# EAGLE board SparkFun_Buck_Regulator_AP63357DV-7_BabyBuck5V-Panel (EAGLE 9.6.2), part 1 of 5
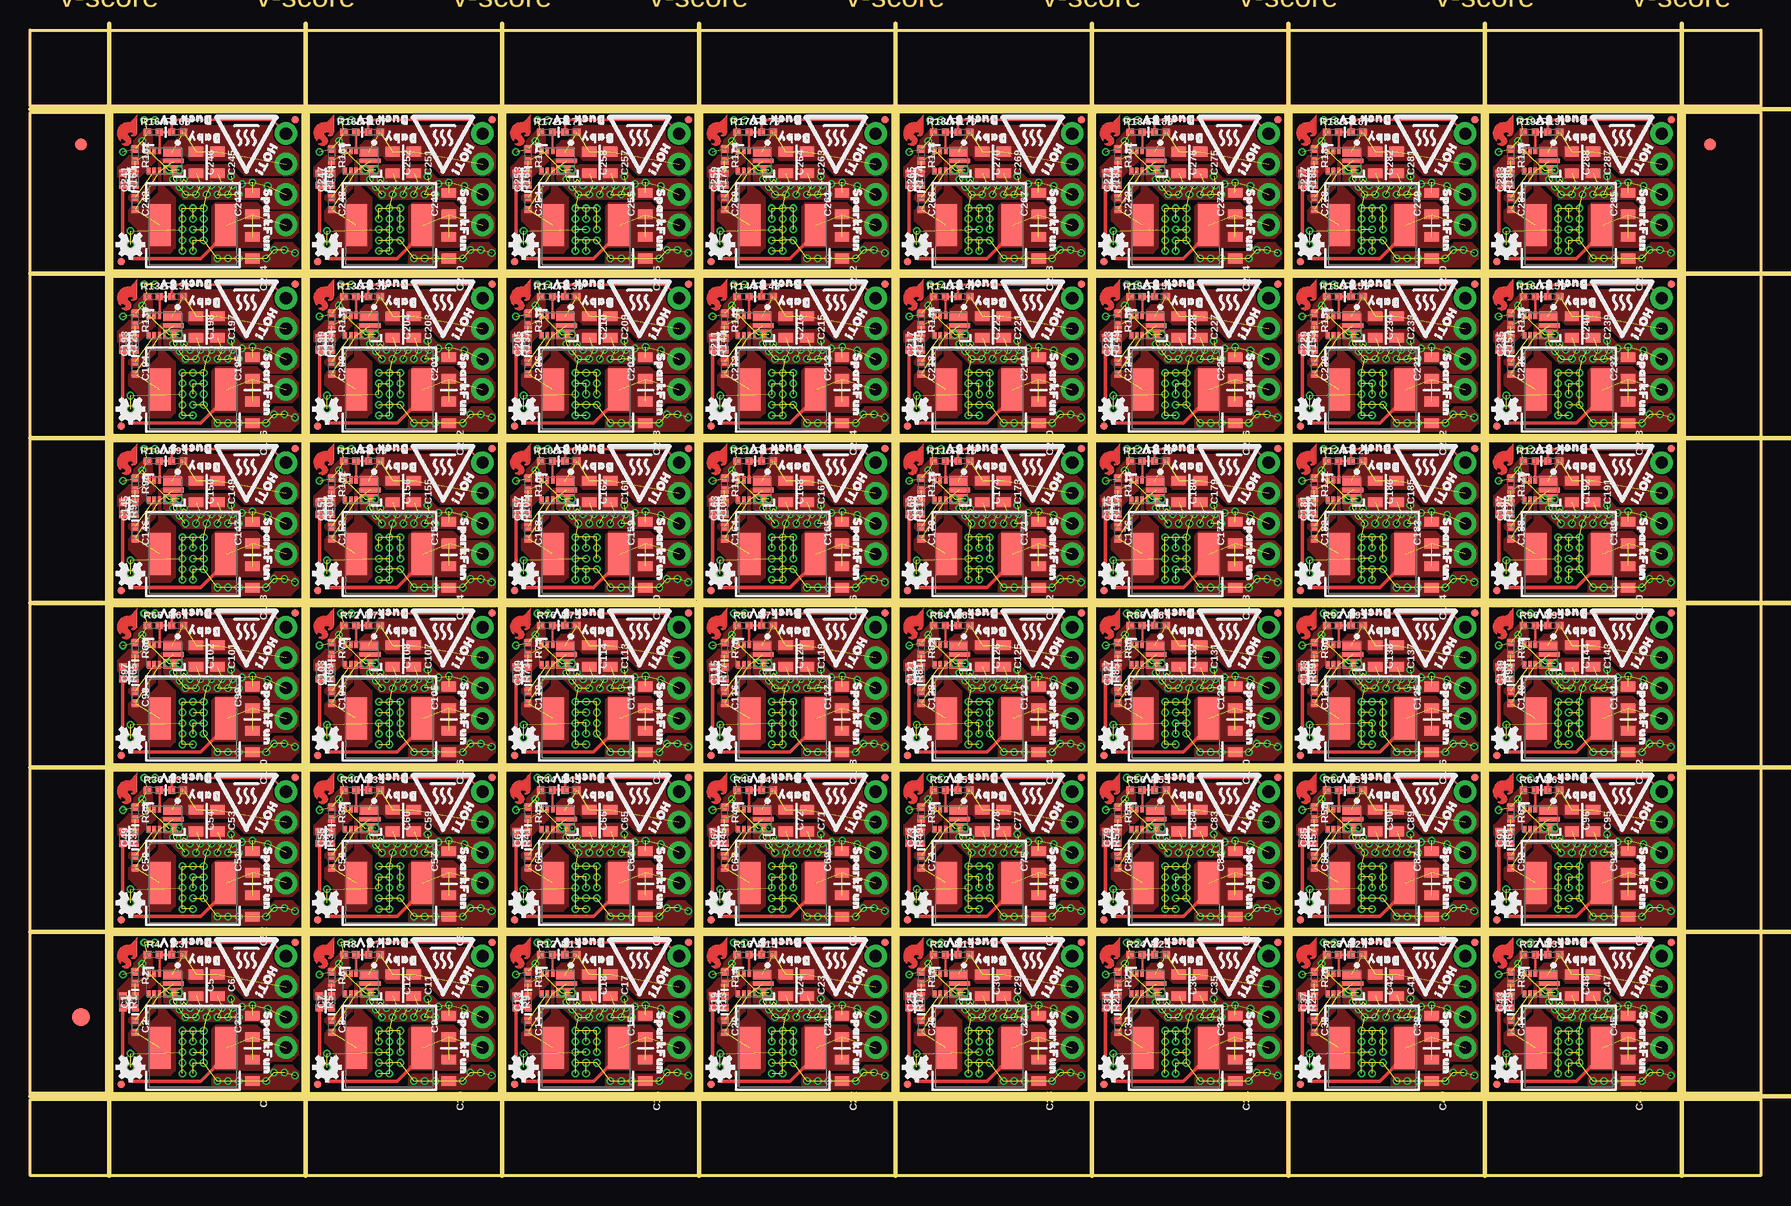
[diagram p0: board, top side]
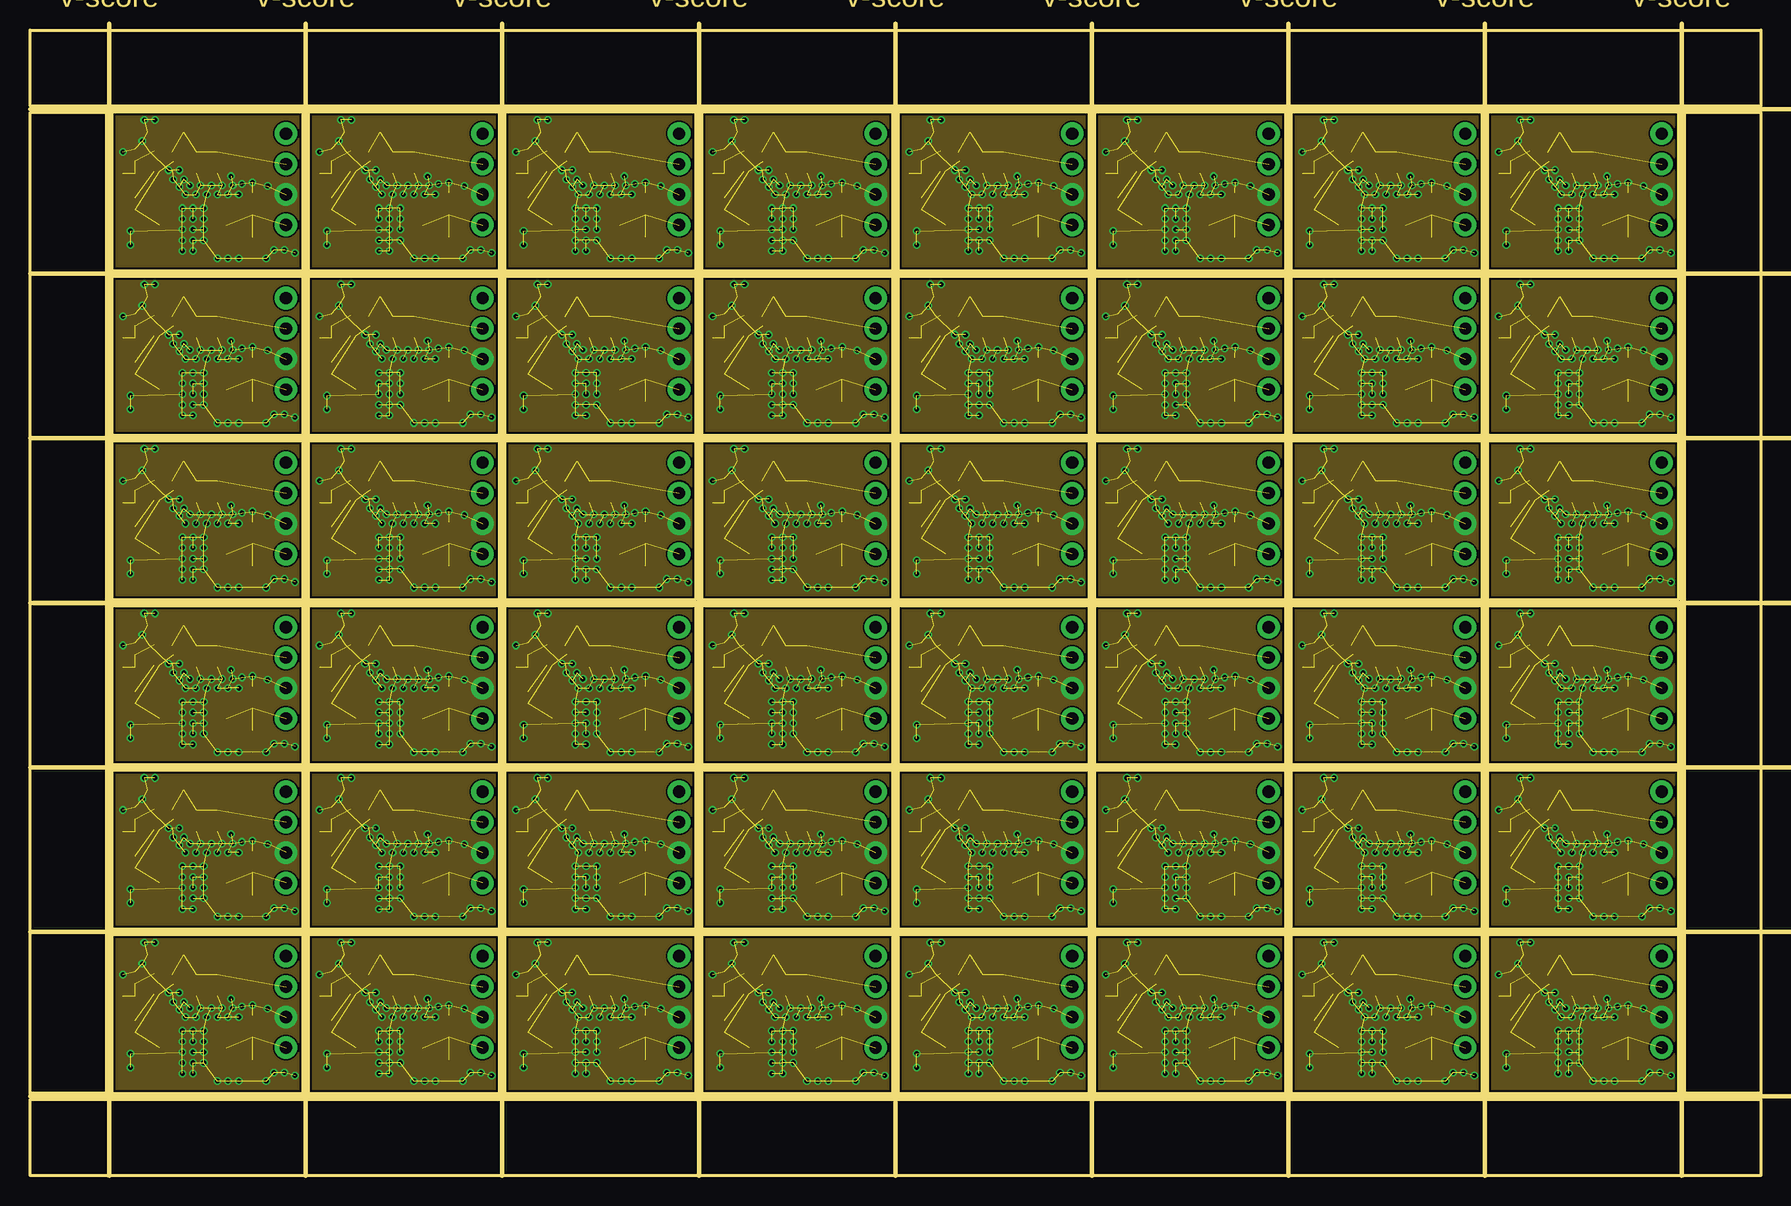
[diagram p1: board, inner layer Route2]
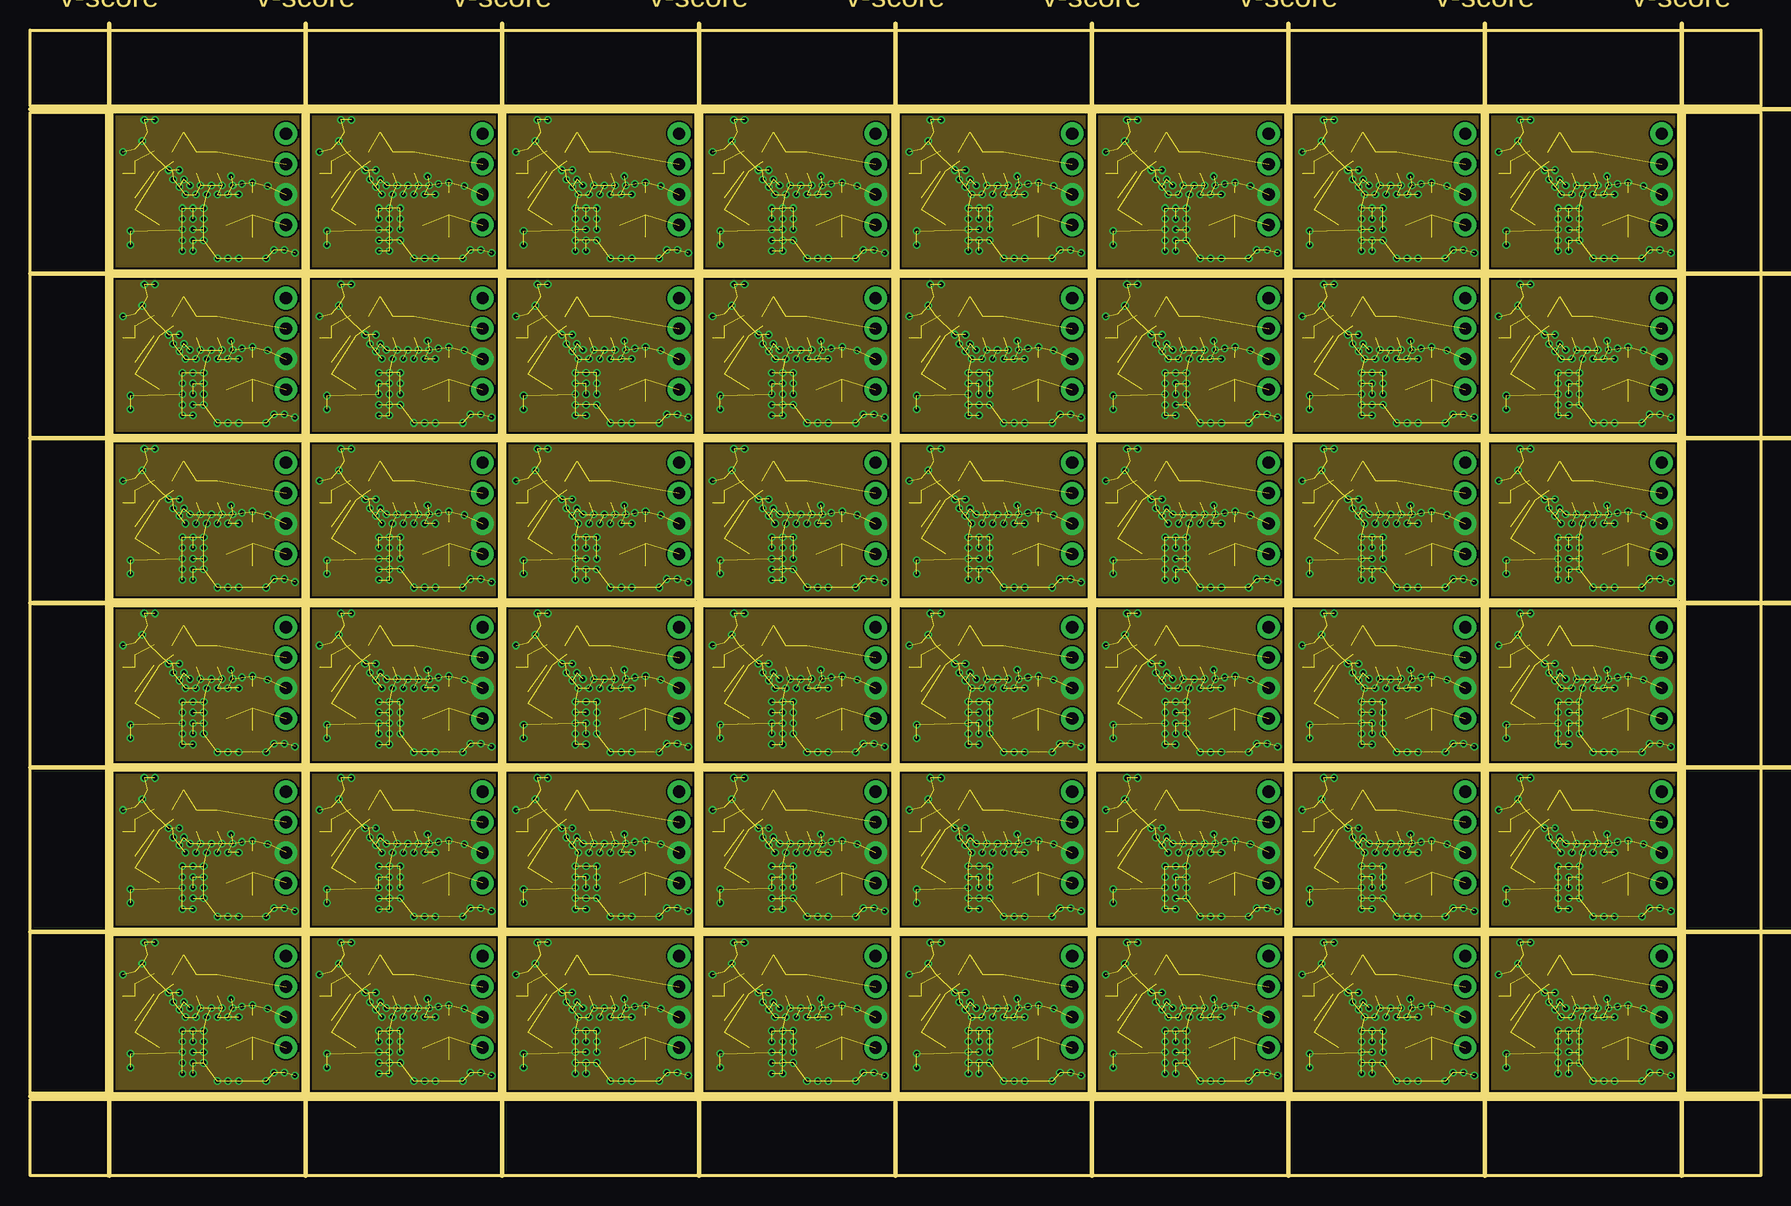
[diagram p2: board, inner layer Route15]
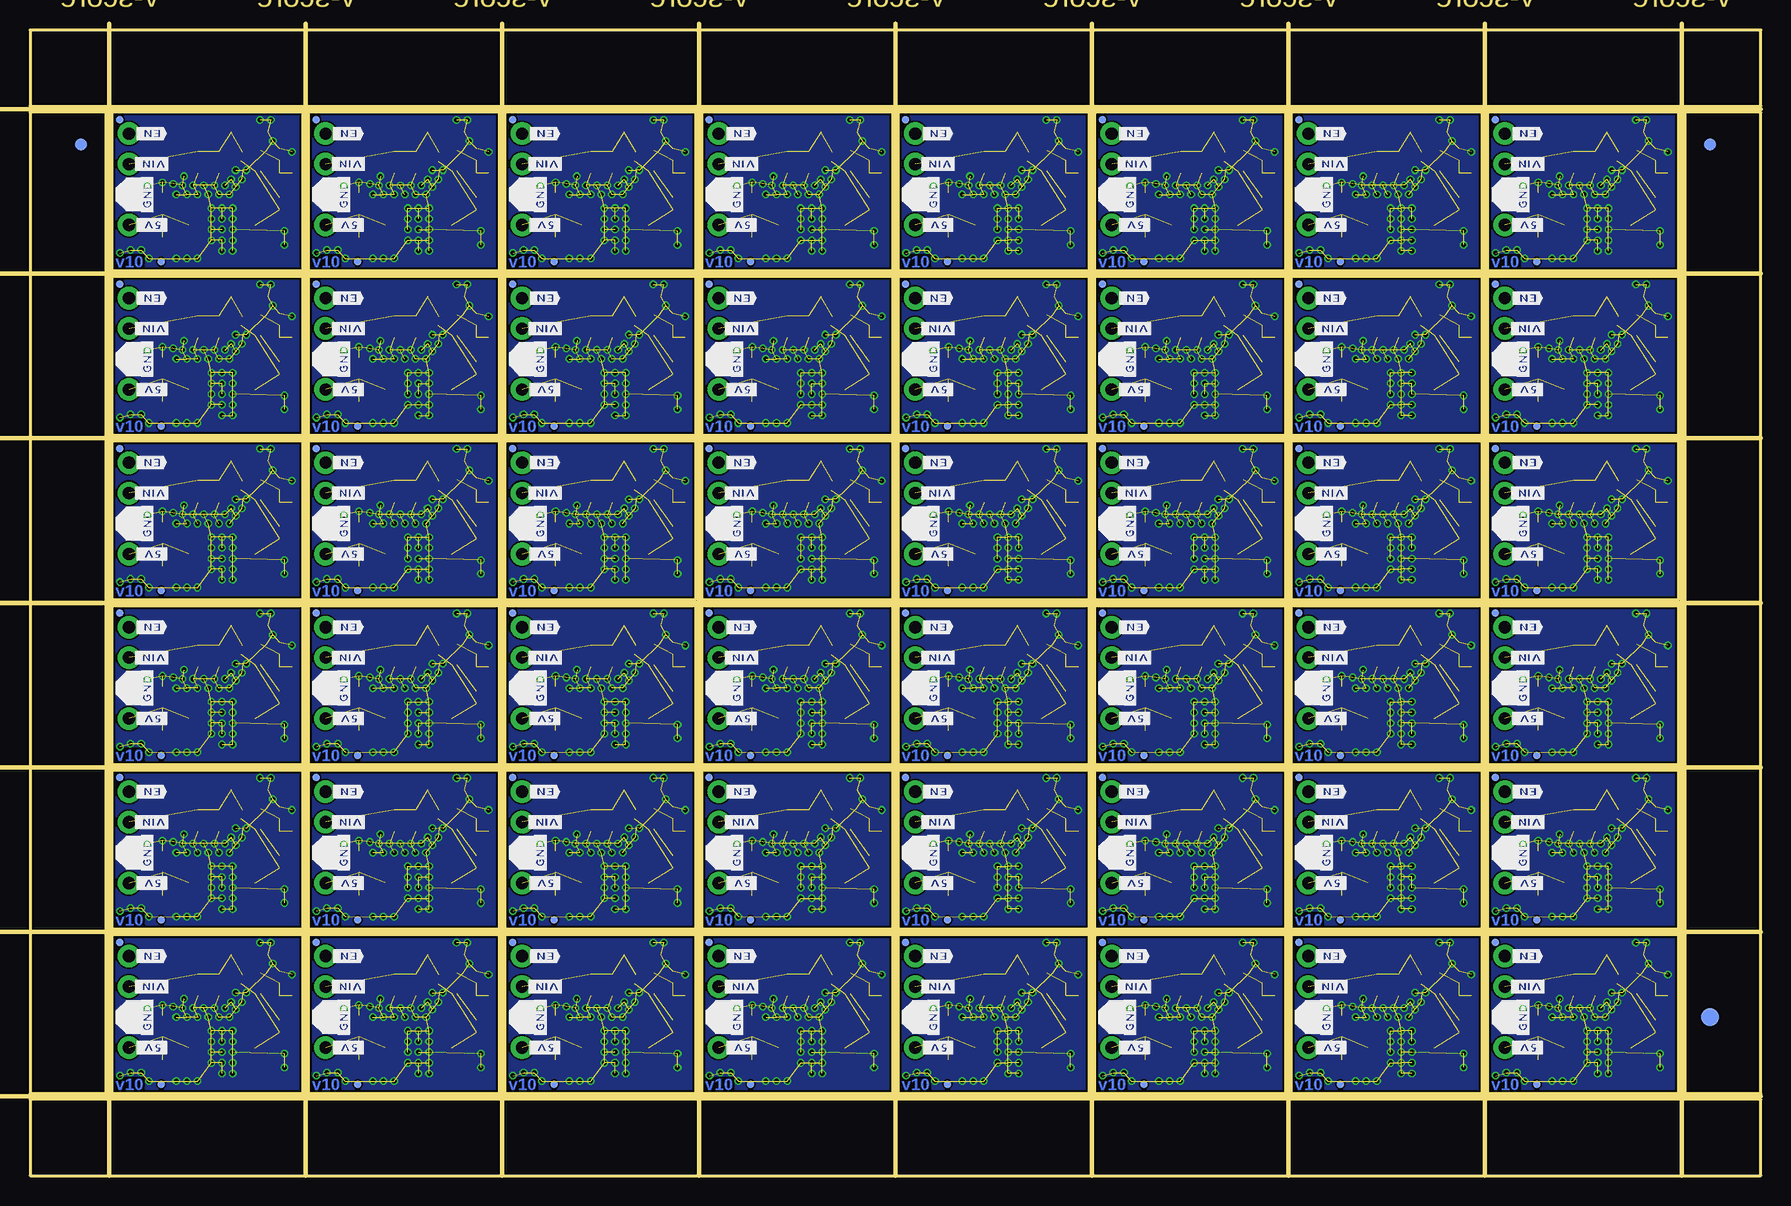
[diagram p3: board, bottom side, seen from below]

Size 144.27 x 95.5 mm. Coordinates in mm from the lower left corner, seen from the top.
Outline: 208 segments
Copper layers (1*2*15*16): Top 0.035mm / dielectric 0.2104mm / Route2 0.035mm / dielectric 0.24mm / Route15 0.035mm / dielectric 0.2104mm / Bottom 0.035mm
Design rules "SparkFun_Buck_Regulator_AP63357DV-7_BabyBuck5V": minimum track width 5mil, minimum drill 0.2mm, track to track 5mil, track to pad 5mil, pad to pad 5mil, via to via 5mil, smd to smd 5mil, copper to edge 7mil, drill to drill 7mil, minimum pad ring 5mil, minimum via ring 5mil, stop-mask expansion 2.5mil, vias tented up to drill 25mil, thermal gap 10mil
Milling: 16 lines

## Footprints (pad centres in the part's own frame; a part is rotated, then mirrored left to right if it is on the bottom)
0402-TIGHT = smd 0.6 x 0.6: 1 -0.5,0; 2 0.5,0
0805 = smd 0.8 x 1.2: 1 -0.9,0; 2 0.9,0
FIDUCIAL-1X2 = smd 1 x 1: 1 0,0
FIDUCIAL-1.5X3 = smd 1.5 x 1.5: 1 0,0
FIDUCIAL-MICRO = smd 0.635 x 0.635: 1 0,0
1X04_NO_SILK = drill 1.016 pad 1.88: 1 0,0; 2 2.54,0; 3 5.08,0; 4 7.62,0
07A7_6U8H = smd 1.85 x 3.5: P$1 -2.775,0; P$2 2.775,0
V-DFN3020-13 = smd 1.5 x 0.8: P$1 -0.675,-0.75; P$8 -0.675,0.75 | smd 0.3 x 0.6: P$2 0.375,-0.85; P$3 0.825,-0.85; P$4 1.275,-0.85; P$5 1.275,0.85; P$6 0.825,0.85; P$7 0.375,0.85 | smd 1.73 x 0.4: P$9 -0.79,0

## Placement (x,y rotation side)
C1  47pF  [0402-TIGHT]  8.76,14.48 90 top
C2  0.1uF  [0402-TIGHT]  8.76,12.45 270 top
C3  22uF  [0805]  18.54,12.45 90 top
C4  22uF  [0805]  18.54,8.76 270 top
C5  4.7uF  [0805]  13.84,15.88 270 top
C6  4.7uF  [0805]  15.62,15.88 270 top
C7  47pF  [0402-TIGHT]  25.15,14.48 90 top
C8  0.1uF  [0402-TIGHT]  25.15,12.45 270 top
C9  22uF  [0805]  34.92,12.45 90 top
C10  22uF  [0805]  34.92,8.76 270 top
C11  4.7uF  [0805]  32,15.88 270 top
C12  4.7uF  [0805]  30.23,15.88 270 top
C13  47pF  [0402-TIGHT]  41.53,14.48 90 top
C14  0.1uF  [0402-TIGHT]  41.53,12.45 270 top
C15  22uF  [0805]  51.31,12.45 90 top
C16  22uF  [0805]  51.31,8.76 270 top
C17  4.7uF  [0805]  48.39,15.88 270 top
C18  4.7uF  [0805]  46.61,15.88 270 top
C19  47pF  [0402-TIGHT]  57.91,14.48 90 top
C20  0.1uF  [0402-TIGHT]  57.91,12.45 270 top
C21  22uF  [0805]  67.69,12.45 90 top
C22  22uF  [0805]  67.69,8.76 270 top
C23  4.7uF  [0805]  64.77,15.88 270 top
C24  4.7uF  [0805]  62.99,15.88 270 top
C25  47pF  [0402-TIGHT]  74.3,14.48 90 top
C26  0.1uF  [0402-TIGHT]  74.3,12.45 270 top
C27  22uF  [0805]  84.07,12.45 90 top
C28  22uF  [0805]  84.07,8.76 270 top
C29  4.7uF  [0805]  81.15,15.88 270 top
C30  4.7uF  [0805]  79.38,15.88 270 top
C31  47pF  [0402-TIGHT]  90.68,14.48 90 top
C32  0.1uF  [0402-TIGHT]  90.68,12.45 270 top
C33  22uF  [0805]  100.46,12.45 90 top
C34  22uF  [0805]  100.46,8.76 270 top
C35  4.7uF  [0805]  97.54,15.88 270 top
C36  4.7uF  [0805]  95.76,15.88 270 top
C37  47pF  [0402-TIGHT]  107.06,14.48 90 top
C38  0.1uF  [0402-TIGHT]  107.06,12.45 270 top
C39  22uF  [0805]  116.84,12.45 90 top
C40  22uF  [0805]  116.84,8.76 270 top
C41  4.7uF  [0805]  113.92,15.88 270 top
C42  4.7uF  [0805]  112.14,15.88 270 top
C43  47pF  [0402-TIGHT]  123.44,14.48 90 top
C44  0.1uF  [0402-TIGHT]  123.44,12.45 270 top
C45  22uF  [0805]  133.22,12.45 90 top
C46  22uF  [0805]  133.22,8.76 270 top
C47  4.7uF  [0805]  130.3,15.88 270 top
C48  4.7uF  [0805]  128.52,15.88 270 top
C49  47pF  [0402-TIGHT]  8.76,28.19 90 top
C50  0.1uF  [0402-TIGHT]  8.76,26.16 270 top
C51  22uF  [0805]  18.54,26.16 90 top
C52  22uF  [0805]  18.54,22.48 270 top
C53  4.7uF  [0805]  15.62,29.59 270 top
C54  4.7uF  [0805]  13.84,29.59 270 top
C55  47pF  [0402-TIGHT]  25.15,28.19 90 top
C56  0.1uF  [0402-TIGHT]  25.15,26.16 270 top
C57  22uF  [0805]  34.92,26.16 90 top
C58  22uF  [0805]  34.92,22.48 270 top
C59  4.7uF  [0805]  32,29.59 270 top
C60  4.7uF  [0805]  30.23,29.59 270 top
C61  47pF  [0402-TIGHT]  41.53,28.19 90 top
C62  0.1uF  [0402-TIGHT]  41.53,26.16 270 top
C63  22uF  [0805]  51.31,26.16 90 top
C64  22uF  [0805]  51.31,22.48 270 top
C65  4.7uF  [0805]  48.39,29.59 270 top
C66  4.7uF  [0805]  46.61,29.59 270 top
C67  47pF  [0402-TIGHT]  57.91,28.19 90 top
C68  0.1uF  [0402-TIGHT]  57.91,26.16 270 top
C69  22uF  [0805]  67.69,26.16 90 top
C70  22uF  [0805]  67.69,22.48 270 top
C71  4.7uF  [0805]  64.77,29.59 270 top
C72  4.7uF  [0805]  62.99,29.59 270 top
C73  47pF  [0402-TIGHT]  74.3,28.19 90 top
C74  0.1uF  [0402-TIGHT]  74.3,26.16 270 top
C75  22uF  [0805]  84.07,26.16 90 top
C76  22uF  [0805]  84.07,22.48 270 top
C77  4.7uF  [0805]  81.15,29.59 270 top
C78  4.7uF  [0805]  79.38,29.59 270 top
C79  47pF  [0402-TIGHT]  90.68,28.19 90 top
C80  0.1uF  [0402-TIGHT]  90.68,26.16 270 top
C81  22uF  [0805]  100.46,26.16 90 top
C82  22uF  [0805]  100.46,22.48 270 top
C83  4.7uF  [0805]  97.54,29.59 270 top
C84  4.7uF  [0805]  95.76,29.59 270 top
C85  47pF  [0402-TIGHT]  107.06,28.19 90 top
C86  0.1uF  [0402-TIGHT]  107.06,26.16 270 top
C87  22uF  [0805]  116.84,26.16 90 top
C88  22uF  [0805]  116.84,22.48 270 top
C89  4.7uF  [0805]  113.92,29.59 270 top
C90  4.7uF  [0805]  112.14,29.59 270 top
C91  47pF  [0402-TIGHT]  123.44,28.19 90 top
C92  0.1uF  [0402-TIGHT]  123.44,26.16 270 top
C93  22uF  [0805]  133.22,26.16 90 top
C94  22uF  [0805]  133.22,22.48 270 top
C95  4.7uF  [0805]  130.3,29.59 270 top
C96  4.7uF  [0805]  128.52,29.59 270 top
C97  47pF  [0402-TIGHT]  8.76,41.91 90 top
C98  0.1uF  [0402-TIGHT]  8.76,39.88 270 top
C99  22uF  [0805]  18.54,39.88 90 top
C100  22uF  [0805]  18.54,36.2 270 top
C101  4.7uF  [0805]  15.62,43.31 270 top
C102  4.7uF  [0805]  13.84,43.31 270 top
C103  47pF  [0402-TIGHT]  25.15,41.91 90 top
C104  0.1uF  [0402-TIGHT]  25.15,39.88 270 top
C105  22uF  [0805]  34.92,39.88 90 top
C106  22uF  [0805]  34.92,36.2 270 top
C107  4.7uF  [0805]  32,43.31 270 top
C108  4.7uF  [0805]  30.23,43.31 270 top
C109  47pF  [0402-TIGHT]  41.53,41.91 90 top
C110  0.1uF  [0402-TIGHT]  41.53,39.88 270 top
C111  22uF  [0805]  51.31,39.88 90 top
C112  22uF  [0805]  51.31,36.2 270 top
C113  4.7uF  [0805]  48.39,43.31 270 top
C114  4.7uF  [0805]  46.61,43.31 270 top
C115  47pF  [0402-TIGHT]  57.91,41.91 90 top
C116  0.1uF  [0402-TIGHT]  57.91,39.88 270 top
C117  22uF  [0805]  67.69,39.88 90 top
C118  22uF  [0805]  67.69,36.2 270 top
C119  4.7uF  [0805]  64.77,43.31 270 top
C120  4.7uF  [0805]  62.99,43.31 270 top
C121  47pF  [0402-TIGHT]  74.3,41.91 90 top
C122  0.1uF  [0402-TIGHT]  74.3,39.88 270 top
C123  22uF  [0805]  84.07,39.88 90 top
C124  22uF  [0805]  84.07,36.2 270 top
C125  4.7uF  [0805]  81.15,43.31 270 top
C126  4.7uF  [0805]  79.38,43.31 270 top
C127  47pF  [0402-TIGHT]  90.68,41.91 90 top
C128  0.1uF  [0402-TIGHT]  90.68,39.88 270 top
C129  22uF  [0805]  100.46,39.88 90 top
C130  22uF  [0805]  100.46,36.2 270 top
C131  4.7uF  [0805]  97.54,43.31 270 top
C132  4.7uF  [0805]  95.76,43.31 270 top
C133  47pF  [0402-TIGHT]  107.06,41.91 90 top
C134  0.1uF  [0402-TIGHT]  107.06,39.88 270 top
C135  22uF  [0805]  116.84,39.88 90 top
C136  22uF  [0805]  116.84,36.2 270 top
C137  4.7uF  [0805]  113.92,43.31 270 top
C138  4.7uF  [0805]  112.14,43.31 270 top
C139  47pF  [0402-TIGHT]  123.44,41.91 90 top
C140  0.1uF  [0402-TIGHT]  123.44,39.88 270 top
C141  22uF  [0805]  133.22,39.88 90 top
C142  22uF  [0805]  133.22,36.2 270 top
C143  4.7uF  [0805]  130.3,43.31 270 top
C144  4.7uF  [0805]  128.52,43.31 270 top
C145  47pF  [0402-TIGHT]  8.76,55.63 90 top
C146  0.1uF  [0402-TIGHT]  8.76,53.59 270 top
C147  22uF  [0805]  18.54,53.59 90 top
C148  22uF  [0805]  18.54,49.91 270 top
C149  4.7uF  [0805]  15.62,57.02 270 top
C150  4.7uF  [0805]  13.84,57.02 270 top
C151  47pF  [0402-TIGHT]  25.15,55.63 90 top
C152  0.1uF  [0402-TIGHT]  25.15,53.59 270 top
C153  22uF  [0805]  34.92,53.59 90 top
C154  22uF  [0805]  34.92,49.91 270 top
C155  4.7uF  [0805]  32,57.02 270 top
C156  4.7uF  [0805]  30.23,57.02 270 top
C157  47pF  [0402-TIGHT]  41.53,55.63 90 top
C158  0.1uF  [0402-TIGHT]  41.53,53.59 270 top
C159  22uF  [0805]  51.31,53.59 90 top
C160  22uF  [0805]  51.31,49.91 270 top
C161  4.7uF  [0805]  48.39,57.02 270 top
C162  4.7uF  [0805]  46.61,57.02 270 top
C163  47pF  [0402-TIGHT]  57.91,55.63 90 top
C164  0.1uF  [0402-TIGHT]  57.91,53.59 270 top
C165  22uF  [0805]  67.69,53.59 90 top
C166  22uF  [0805]  67.69,49.91 270 top
C167  4.7uF  [0805]  64.77,57.02 270 top
C168  4.7uF  [0805]  62.99,57.02 270 top
C169  47pF  [0402-TIGHT]  74.3,55.63 90 top
C170  0.1uF  [0402-TIGHT]  74.3,53.59 270 top
C171  22uF  [0805]  84.07,53.59 90 top
C172  22uF  [0805]  84.07,49.91 270 top
C173  4.7uF  [0805]  81.15,57.02 270 top
C174  4.7uF  [0805]  79.38,57.02 270 top
C175  47pF  [0402-TIGHT]  90.68,55.63 90 top
C176  0.1uF  [0402-TIGHT]  90.68,53.59 270 top
C177  22uF  [0805]  100.46,53.59 90 top
C178  22uF  [0805]  100.46,49.91 270 top
C179  4.7uF  [0805]  97.54,57.02 270 top
C180  4.7uF  [0805]  95.76,57.02 270 top
C181  47pF  [0402-TIGHT]  107.06,55.63 90 top
C182  0.1uF  [0402-TIGHT]  107.06,53.59 270 top
C183  22uF  [0805]  116.84,53.59 90 top
C184  22uF  [0805]  116.84,49.91 270 top
C185  4.7uF  [0805]  113.92,57.02 270 top
C186  4.7uF  [0805]  112.14,57.02 270 top
C187  47pF  [0402-TIGHT]  123.44,55.63 90 top
C188  0.1uF  [0402-TIGHT]  123.44,53.59 270 top
C189  22uF  [0805]  133.22,53.59 90 top
C190  22uF  [0805]  133.22,49.91 270 top
C191  4.7uF  [0805]  130.3,57.02 270 top
C192  4.7uF  [0805]  128.52,57.02 270 top
C193  47pF  [0402-TIGHT]  8.76,69.34 90 top
C194  0.1uF  [0402-TIGHT]  8.76,67.31 270 top
C195  22uF  [0805]  18.54,67.31 90 top
C196  22uF  [0805]  18.54,63.63 270 top
C197  4.7uF  [0805]  15.62,70.74 270 top
C198  4.7uF  [0805]  13.84,70.74 270 top
C199  47pF  [0402-TIGHT]  25.15,69.34 90 top
C200  0.1uF  [0402-TIGHT]  25.15,67.31 270 top
C201  22uF  [0805]  34.92,67.31 90 top
C202  22uF  [0805]  34.92,63.63 270 top
C203  4.7uF  [0805]  32,70.74 270 top
C204  4.7uF  [0805]  30.23,70.74 270 top
C205  47pF  [0402-TIGHT]  41.53,69.34 90 top
C206  0.1uF  [0402-TIGHT]  41.53,67.31 270 top
C207  22uF  [0805]  51.31,67.31 90 top
C208  22uF  [0805]  51.31,63.63 270 top
C209  4.7uF  [0805]  48.39,70.74 270 top
C210  4.7uF  [0805]  46.61,70.74 270 top
C211  47pF  [0402-TIGHT]  57.91,69.34 90 top
C212  0.1uF  [0402-TIGHT]  57.91,67.31 270 top
C213  22uF  [0805]  67.69,67.31 90 top
C214  22uF  [0805]  67.69,63.63 270 top
C215  4.7uF  [0805]  64.77,70.74 270 top
C216  4.7uF  [0805]  62.99,70.74 270 top
C217  47pF  [0402-TIGHT]  74.3,69.34 90 top
C218  0.1uF  [0402-TIGHT]  74.3,67.31 270 top
C219  22uF  [0805]  84.07,67.31 90 top
C220  22uF  [0805]  84.07,63.63 270 top
C221  4.7uF  [0805]  81.15,70.74 270 top
C222  4.7uF  [0805]  79.38,70.74 270 top
C223  47pF  [0402-TIGHT]  90.68,69.34 90 top
C224  0.1uF  [0402-TIGHT]  90.68,67.31 270 top
C225  22uF  [0805]  100.46,67.31 90 top
C226  22uF  [0805]  100.46,63.63 270 top
C227  4.7uF  [0805]  97.54,70.74 270 top
C228  4.7uF  [0805]  95.76,70.74 270 top
C229  47pF  [0402-TIGHT]  107.06,69.34 90 top
C230  0.1uF  [0402-TIGHT]  107.06,67.31 270 top
C231  22uF  [0805]  116.84,67.31 90 top
C232  22uF  [0805]  116.84,63.63 270 top
C233  4.7uF  [0805]  113.92,70.74 270 top
C234  4.7uF  [0805]  112.14,70.74 270 top
C235  47pF  [0402-TIGHT]  123.44,69.34 90 top
C236  0.1uF  [0402-TIGHT]  123.44,67.31 270 top
C237  22uF  [0805]  133.22,67.31 90 top
C238  22uF  [0805]  133.22,63.63 270 top
C239  4.7uF  [0805]  130.3,70.74 270 top
C240  4.7uF  [0805]  128.52,70.74 270 top
C241  47pF  [0402-TIGHT]  8.76,83.06 90 top
C242  0.1uF  [0402-TIGHT]  8.76,81.03 270 top
C243  22uF  [0805]  18.54,81.03 90 top
C244  22uF  [0805]  18.54,77.34 270 top
C245  4.7uF  [0805]  15.62,84.45 270 top
C246  4.7uF  [0805]  13.84,84.45 270 top
C247  47pF  [0402-TIGHT]  25.15,83.06 90 top
C248  0.1uF  [0402-TIGHT]  25.15,81.03 270 top
C249  22uF  [0805]  34.92,81.03 90 top
C250  22uF  [0805]  34.92,77.34 270 top
C251  4.7uF  [0805]  32,84.45 270 top
C252  4.7uF  [0805]  30.23,84.45 270 top
C253  47pF  [0402-TIGHT]  41.53,83.06 90 top
C254  0.1uF  [0402-TIGHT]  41.53,81.03 270 top
C255  22uF  [0805]  51.31,81.03 90 top
C256  22uF  [0805]  51.31,77.34 270 top
C257  4.7uF  [0805]  48.39,84.45 270 top
C258  4.7uF  [0805]  46.61,84.45 270 top
C259  47pF  [0402-TIGHT]  57.91,83.06 90 top
C260  0.1uF  [0402-TIGHT]  57.91,81.03 270 top
C261  22uF  [0805]  67.69,81.03 90 top
C262  22uF  [0805]  67.69,77.34 270 top
C263  4.7uF  [0805]  64.77,84.45 270 top
C264  4.7uF  [0805]  62.99,84.45 270 top
C265  47pF  [0402-TIGHT]  74.3,83.06 90 top
C266  0.1uF  [0402-TIGHT]  74.3,81.03 270 top
C267  22uF  [0805]  84.07,81.03 90 top
C268  22uF  [0805]  84.07,77.34 270 top
C269  4.7uF  [0805]  81.15,84.45 270 top
C270  4.7uF  [0805]  79.38,84.45 270 top
C271  47pF  [0402-TIGHT]  90.68,83.06 90 top
C272  0.1uF  [0402-TIGHT]  90.68,81.03 270 top
C273  22uF  [0805]  100.46,81.03 90 top
C274  22uF  [0805]  100.46,77.34 270 top
C275  4.7uF  [0805]  97.54,84.45 270 top
C276  4.7uF  [0805]  95.76,84.45 270 top
C277  47pF  [0402-TIGHT]  107.06,83.06 90 top
C278  0.1uF  [0402-TIGHT]  107.06,81.03 270 top
C279  22uF  [0805]  116.84,81.03 90 top
C280  22uF  [0805]  116.84,77.34 270 top
C281  4.7uF  [0805]  113.92,84.45 270 top
C282  4.7uF  [0805]  112.14,84.45 270 top
C283  47pF  [0402-TIGHT]  123.44,83.06 90 top
C284  0.1uF  [0402-TIGHT]  123.44,81.03 270 top
C285  22uF  [0805]  133.22,81.03 90 top
C286  22uF  [0805]  133.22,77.34 270 top
C287  4.7uF  [0805]  130.3,84.45 270 top
C288  4.7uF  [0805]  128.52,84.45 270 top
E$1  [FIDUCIAL-1X2]  4.23,85.98 0 top
E$2  [FIDUCIAL-1X2]  4.23,85.98 0 bottom
E$3  [FIDUCIAL-1X2]  140.04,85.98 0 top
E$4  [FIDUCIAL-1X2]  140.04,85.98 0 bottom
E$5  [FIDUCIAL-1.5X3]  4.23,13.21 0 top
E$6  [FIDUCIAL-1.5X3]  4.23,13.21 0 bottom
FD1  FIDUCIALUFIDUCIAL  [FIDUCIAL-MICRO]  22.12,19.46 0 bottom
FD2  FIDUCIALUFIDUCIAL  [FIDUCIAL-MICRO]  7.61,7.61 0 top
FD3  FIDUCIALUFIDUCIAL  [FIDUCIAL-MICRO]  22.12,19.46 0 top
FD4  FIDUCIALUFIDUCIAL  [FIDUCIAL-MICRO]  18.66,7.61 0 bottom
FD5  FIDUCIALUFIDUCIAL  [FIDUCIAL-MICRO]  38.51,19.46 0 top
FD6  FIDUCIALUFIDUCIAL  [FIDUCIAL-MICRO]  38.51,19.46 0 bottom
FD7  FIDUCIALUFIDUCIAL  [FIDUCIAL-MICRO]  23.99,7.61 0 top
FD8  FIDUCIALUFIDUCIAL  [FIDUCIAL-MICRO]  35.04,7.61 0 bottom
FD9  FIDUCIALUFIDUCIAL  [FIDUCIAL-MICRO]  54.89,19.46 0 top
FD10  FIDUCIALUFIDUCIAL  [FIDUCIAL-MICRO]  54.89,19.46 0 bottom
FD11  FIDUCIALUFIDUCIAL  [FIDUCIAL-MICRO]  40.38,7.61 0 top
FD12  FIDUCIALUFIDUCIAL  [FIDUCIAL-MICRO]  51.42,7.61 0 bottom
FD13  FIDUCIALUFIDUCIAL  [FIDUCIAL-MICRO]  71.27,19.46 0 top
FD14  FIDUCIALUFIDUCIAL  [FIDUCIAL-MICRO]  71.27,19.46 0 bottom
FD15  FIDUCIALUFIDUCIAL  [FIDUCIAL-MICRO]  56.76,7.61 0 top
FD16  FIDUCIALUFIDUCIAL  [FIDUCIAL-MICRO]  67.81,7.61 0 bottom
FD17  FIDUCIALUFIDUCIAL  [FIDUCIAL-MICRO]  87.66,19.46 0 top
FD18  FIDUCIALUFIDUCIAL  [FIDUCIAL-MICRO]  87.66,19.46 0 bottom
FD19  FIDUCIALUFIDUCIAL  [FIDUCIAL-MICRO]  73.14,7.61 0 top
FD20  FIDUCIALUFIDUCIAL  [FIDUCIAL-MICRO]  84.19,7.61 0 bottom
FD21  FIDUCIALUFIDUCIAL  [FIDUCIAL-MICRO]  104.04,19.46 0 top
FD22  FIDUCIALUFIDUCIAL  [FIDUCIAL-MICRO]  104.04,19.46 0 bottom
FD23  FIDUCIALUFIDUCIAL  [FIDUCIAL-MICRO]  89.52,7.61 0 top
FD24  FIDUCIALUFIDUCIAL  [FIDUCIAL-MICRO]  100.57,7.61 0 bottom
FD25  FIDUCIALUFIDUCIAL  [FIDUCIAL-MICRO]  120.42,19.46 0 top
FD26  FIDUCIALUFIDUCIAL  [FIDUCIAL-MICRO]  120.42,19.46 0 bottom
FD27  FIDUCIALUFIDUCIAL  [FIDUCIAL-MICRO]  105.91,7.61 0 top
FD28  FIDUCIALUFIDUCIAL  [FIDUCIAL-MICRO]  116.96,7.61 0 bottom
FD29  FIDUCIALUFIDUCIAL  [FIDUCIAL-MICRO]  136.8,19.46 0 top
FD30  FIDUCIALUFIDUCIAL  [FIDUCIAL-MICRO]  136.8,19.46 0 bottom
FD31  FIDUCIALUFIDUCIAL  [FIDUCIAL-MICRO]  122.29,7.61 0 top
FD32  FIDUCIALUFIDUCIAL  [FIDUCIAL-MICRO]  133.34,7.61 0 bottom
FD33  FIDUCIALUFIDUCIAL  [FIDUCIAL-MICRO]  22.12,33.17 0 top
FD34  FIDUCIALUFIDUCIAL  [FIDUCIAL-MICRO]  22.12,33.17 0 bottom
FD35  FIDUCIALUFIDUCIAL  [FIDUCIAL-MICRO]  7.61,21.33 0 top
FD36  FIDUCIALUFIDUCIAL  [FIDUCIAL-MICRO]  18.66,21.33 0 bottom
FD37  FIDUCIALUFIDUCIAL  [FIDUCIAL-MICRO]  38.51,33.17 0 top
FD38  FIDUCIALUFIDUCIAL  [FIDUCIAL-MICRO]  38.51,33.17 0 bottom
FD39  FIDUCIALUFIDUCIAL  [FIDUCIAL-MICRO]  23.99,21.33 0 top
FD40  FIDUCIALUFIDUCIAL  [FIDUCIAL-MICRO]  35.04,21.33 0 bottom
FD41  FIDUCIALUFIDUCIAL  [FIDUCIAL-MICRO]  54.89,33.17 0 top
FD42  FIDUCIALUFIDUCIAL  [FIDUCIAL-MICRO]  54.89,33.17 0 bottom
FD43  FIDUCIALUFIDUCIAL  [FIDUCIAL-MICRO]  40.38,21.33 0 top
FD44  FIDUCIALUFIDUCIAL  [FIDUCIAL-MICRO]  51.42,21.33 0 bottom
FD45  FIDUCIALUFIDUCIAL  [FIDUCIAL-MICRO]  71.27,33.17 0 top
FD46  FIDUCIALUFIDUCIAL  [FIDUCIAL-MICRO]  71.27,33.17 0 bottom
FD47  FIDUCIALUFIDUCIAL  [FIDUCIAL-MICRO]  56.76,21.33 0 top
FD48  FIDUCIALUFIDUCIAL  [FIDUCIAL-MICRO]  67.81,21.33 0 bottom
FD49  FIDUCIALUFIDUCIAL  [FIDUCIAL-MICRO]  87.66,33.17 0 top
FD50  FIDUCIALUFIDUCIAL  [FIDUCIAL-MICRO]  87.66,33.17 0 bottom
FD51  FIDUCIALUFIDUCIAL  [FIDUCIAL-MICRO]  73.14,21.33 0 top
FD52  FIDUCIALUFIDUCIAL  [FIDUCIAL-MICRO]  84.19,21.33 0 bottom
FD53  FIDUCIALUFIDUCIAL  [FIDUCIAL-MICRO]  104.04,33.17 0 top
FD54  FIDUCIALUFIDUCIAL  [FIDUCIAL-MICRO]  104.04,33.17 0 bottom
FD55  FIDUCIALUFIDUCIAL  [FIDUCIAL-MICRO]  89.52,21.33 0 top
FD56  FIDUCIALUFIDUCIAL  [FIDUCIAL-MICRO]  100.57,21.33 0 bottom
FD57  FIDUCIALUFIDUCIAL  [FIDUCIAL-MICRO]  120.42,33.17 0 top
FD58  FIDUCIALUFIDUCIAL  [FIDUCIAL-MICRO]  120.42,33.17 0 bottom
FD59  FIDUCIALUFIDUCIAL  [FIDUCIAL-MICRO]  105.91,21.33 0 top
FD60  FIDUCIALUFIDUCIAL  [FIDUCIAL-MICRO]  116.96,21.33 0 bottom
FD61  FIDUCIALUFIDUCIAL  [FIDUCIAL-MICRO]  136.8,33.17 0 top
FD62  FIDUCIALUFIDUCIAL  [FIDUCIAL-MICRO]  136.8,33.17 0 bottom
FD63  FIDUCIALUFIDUCIAL  [FIDUCIAL-MICRO]  122.29,21.33 0 top
FD64  FIDUCIALUFIDUCIAL  [FIDUCIAL-MICRO]  133.34,21.33 0 bottom
FD65  FIDUCIALUFIDUCIAL  [FIDUCIAL-MICRO]  22.12,46.89 0 top
FD66  FIDUCIALUFIDUCIAL  [FIDUCIAL-MICRO]  22.12,46.89 0 bottom
FD67  FIDUCIALUFIDUCIAL  [FIDUCIAL-MICRO]  7.61,35.04 0 top
FD68  FIDUCIALUFIDUCIAL  [FIDUCIAL-MICRO]  18.66,35.04 0 bottom
FD69  FIDUCIALUFIDUCIAL  [FIDUCIAL-MICRO]  38.51,46.89 0 top
FD70  FIDUCIALUFIDUCIAL  [FIDUCIAL-MICRO]  38.51,46.89 0 bottom
FD71  FIDUCIALUFIDUCIAL  [FIDUCIAL-MICRO]  23.99,35.04 0 top
FD72  FIDUCIALUFIDUCIAL  [FIDUCIAL-MICRO]  35.04,35.04 0 bottom
FD73  FIDUCIALUFIDUCIAL  [FIDUCIAL-MICRO]  54.89,46.89 0 top
FD74  FIDUCIALUFIDUCIAL  [FIDUCIAL-MICRO]  54.89,46.89 0 bottom
FD75  FIDUCIALUFIDUCIAL  [FIDUCIAL-MICRO]  40.38,35.04 0 top
FD76  FIDUCIALUFIDUCIAL  [FIDUCIAL-MICRO]  51.42,35.04 0 bottom
FD77  FIDUCIALUFIDUCIAL  [FIDUCIAL-MICRO]  71.27,46.89 0 top
FD78  FIDUCIALUFIDUCIAL  [FIDUCIAL-MICRO]  71.27,46.89 0 bottom
FD79  FIDUCIALUFIDUCIAL  [FIDUCIAL-MICRO]  56.76,35.04 0 top
FD80  FIDUCIALUFIDUCIAL  [FIDUCIAL-MICRO]  67.81,35.04 0 bottom
FD81  FIDUCIALUFIDUCIAL  [FIDUCIAL-MICRO]  87.66,46.89 0 top
FD82  FIDUCIALUFIDUCIAL  [FIDUCIAL-MICRO]  87.66,46.89 0 bottom
FD83  FIDUCIALUFIDUCIAL  [FIDUCIAL-MICRO]  73.14,35.04 0 top
FD84  FIDUCIALUFIDUCIAL  [FIDUCIAL-MICRO]  84.19,35.04 0 bottom
FD85  FIDUCIALUFIDUCIAL  [FIDUCIAL-MICRO]  104.04,46.89 0 top
FD86  FIDUCIALUFIDUCIAL  [FIDUCIAL-MICRO]  104.04,46.89 0 bottom
FD87  FIDUCIALUFIDUCIAL  [FIDUCIAL-MICRO]  89.52,35.04 0 top
FD88  FIDUCIALUFIDUCIAL  [FIDUCIAL-MICRO]  100.57,35.04 0 bottom
FD89  FIDUCIALUFIDUCIAL  [FIDUCIAL-MICRO]  120.42,46.89 0 top
FD90  FIDUCIALUFIDUCIAL  [FIDUCIAL-MICRO]  120.42,46.89 0 bottom
FD91  FIDUCIALUFIDUCIAL  [FIDUCIAL-MICRO]  105.91,35.04 0 top
FD92  FIDUCIALUFIDUCIAL  [FIDUCIAL-MICRO]  116.96,35.04 0 bottom
FD93  FIDUCIALUFIDUCIAL  [FIDUCIAL-MICRO]  136.8,46.89 0 top
FD94  FIDUCIALUFIDUCIAL  [FIDUCIAL-MICRO]  136.8,46.89 0 bottom
FD95  FIDUCIALUFIDUCIAL  [FIDUCIAL-MICRO]  122.29,35.04 0 top
FD96  FIDUCIALUFIDUCIAL  [FIDUCIAL-MICRO]  133.34,35.04 0 bottom
FD97  FIDUCIALUFIDUCIAL  [FIDUCIAL-MICRO]  22.12,60.6 0 top
FD98  FIDUCIALUFIDUCIAL  [FIDUCIAL-MICRO]  22.12,60.6 0 bottom
FD99  FIDUCIALUFIDUCIAL  [FIDUCIAL-MICRO]  7.61,48.76 0 top
FD100  FIDUCIALUFIDUCIAL  [FIDUCIAL-MICRO]  18.66,48.76 0 bottom
FD101  FIDUCIALUFIDUCIAL  [FIDUCIAL-MICRO]  38.51,60.6 0 top
FD102  FIDUCIALUFIDUCIAL  [FIDUCIAL-MICRO]  38.51,60.6 0 bottom
FD103  FIDUCIALUFIDUCIAL  [FIDUCIAL-MICRO]  23.99,48.76 0 top
FD104  FIDUCIALUFIDUCIAL  [FIDUCIAL-MICRO]  35.04,48.76 0 bottom
FD105  FIDUCIALUFIDUCIAL  [FIDUCIAL-MICRO]  54.89,60.6 0 top
FD106  FIDUCIALUFIDUCIAL  [FIDUCIAL-MICRO]  54.89,60.6 0 bottom
FD107  FIDUCIALUFIDUCIAL  [FIDUCIAL-MICRO]  40.38,48.76 0 top
FD108  FIDUCIALUFIDUCIAL  [FIDUCIAL-MICRO]  51.42,48.76 0 bottom
FD109  FIDUCIALUFIDUCIAL  [FIDUCIAL-MICRO]  71.27,60.6 0 top
FD110  FIDUCIALUFIDUCIAL  [FIDUCIAL-MICRO]  71.27,60.6 0 bottom
FD111  FIDUCIALUFIDUCIAL  [FIDUCIAL-MICRO]  56.76,48.76 0 top
FD112  FIDUCIALUFIDUCIAL  [FIDUCIAL-MICRO]  67.81,48.76 0 bottom
FD113  FIDUCIALUFIDUCIAL  [FIDUCIAL-MICRO]  87.66,60.6 0 top
FD114  FIDUCIALUFIDUCIAL  [FIDUCIAL-MICRO]  87.66,60.6 0 bottom
FD115  FIDUCIALUFIDUCIAL  [FIDUCIAL-MICRO]  73.14,48.76 0 top
FD116  FIDUCIALUFIDUCIAL  [FIDUCIAL-MICRO]  84.19,48.76 0 bottom
FD117  FIDUCIALUFIDUCIAL  [FIDUCIAL-MICRO]  104.04,60.6 0 top
FD118  FIDUCIALUFIDUCIAL  [FIDUCIAL-MICRO]  104.04,60.6 0 bottom
FD119  FIDUCIALUFIDUCIAL  [FIDUCIAL-MICRO]  89.52,48.76 0 top
FD120  FIDUCIALUFIDUCIAL  [FIDUCIAL-MICRO]  100.57,48.76 0 bottom
FD121  FIDUCIALUFIDUCIAL  [FIDUCIAL-MICRO]  120.42,60.6 0 top
FD122  FIDUCIALUFIDUCIAL  [FIDUCIAL-MICRO]  120.42,60.6 0 bottom
FD123  FIDUCIALUFIDUCIAL  [FIDUCIAL-MICRO]  105.91,48.76 0 top
FD124  FIDUCIALUFIDUCIAL  [FIDUCIAL-MICRO]  116.96,48.76 0 bottom
FD125  FIDUCIALUFIDUCIAL  [FIDUCIAL-MICRO]  136.8,60.6 0 top
FD126  FIDUCIALUFIDUCIAL  [FIDUCIAL-MICRO]  136.8,60.6 0 bottom
FD127  FIDUCIALUFIDUCIAL  [FIDUCIAL-MICRO]  122.29,48.76 0 top
FD128  FIDUCIALUFIDUCIAL  [FIDUCIAL-MICRO]  133.34,48.76 0 bottom
FD129  FIDUCIALUFIDUCIAL  [FIDUCIAL-MICRO]  22.12,74.32 0 top
FD130  FIDUCIALUFIDUCIAL  [FIDUCIAL-MICRO]  22.12,74.32 0 bottom
FD131  FIDUCIALUFIDUCIAL  [FIDUCIAL-MICRO]  7.61,62.48 0 top
FD132  FIDUCIALUFIDUCIAL  [FIDUCIAL-MICRO]  18.66,62.48 0 bottom
FD133  FIDUCIALUFIDUCIAL  [FIDUCIAL-MICRO]  38.51,74.32 0 top
FD134  FIDUCIALUFIDUCIAL  [FIDUCIAL-MICRO]  38.51,74.32 0 bottom
FD135  FIDUCIALUFIDUCIAL  [FIDUCIAL-MICRO]  23.99,62.48 0 top
FD136  FIDUCIALUFIDUCIAL  [FIDUCIAL-MICRO]  35.04,62.48 0 bottom
FD137  FIDUCIALUFIDUCIAL  [FIDUCIAL-MICRO]  54.89,74.32 0 top
FD138  FIDUCIALUFIDUCIAL  [FIDUCIAL-MICRO]  54.89,74.32 0 bottom
FD139  FIDUCIALUFIDUCIAL  [FIDUCIAL-MICRO]  40.38,62.48 0 top
FD140  FIDUCIALUFIDUCIAL  [FIDUCIAL-MICRO]  51.42,62.48 0 bottom
FD141  FIDUCIALUFIDUCIAL  [FIDUCIAL-MICRO]  71.27,74.32 0 top
FD142  FIDUCIALUFIDUCIAL  [FIDUCIAL-MICRO]  71.27,74.32 0 bottom
FD143  FIDUCIALUFIDUCIAL  [FIDUCIAL-MICRO]  56.76,62.48 0 top
FD144  FIDUCIALUFIDUCIAL  [FIDUCIAL-MICRO]  67.81,62.48 0 bottom
FD145  FIDUCIALUFIDUCIAL  [FIDUCIAL-MICRO]  87.66,74.32 0 top
FD146  FIDUCIALUFIDUCIAL  [FIDUCIAL-MICRO]  87.66,74.32 0 bottom
FD147  FIDUCIALUFIDUCIAL  [FIDUCIAL-MICRO]  73.14,62.48 0 top
FD148  FIDUCIALUFIDUCIAL  [FIDUCIAL-MICRO]  84.19,62.48 0 bottom
FD149  FIDUCIALUFIDUCIAL  [FIDUCIAL-MICRO]  104.04,74.32 0 top
FD150  FIDUCIALUFIDUCIAL  [FIDUCIAL-MICRO]  104.04,74.32 0 bottom
FD151  FIDUCIALUFIDUCIAL  [FIDUCIAL-MICRO]  89.52,62.48 0 top
FD152  FIDUCIALUFIDUCIAL  [FIDUCIAL-MICRO]  100.57,62.48 0 bottom
FD153  FIDUCIALUFIDUCIAL  [FIDUCIAL-MICRO]  120.42,74.32 0 top
FD154  FIDUCIALUFIDUCIAL  [FIDUCIAL-MICRO]  120.42,74.32 0 bottom
FD155  FIDUCIALUFIDUCIAL  [FIDUCIAL-MICRO]  105.91,62.48 0 top
FD156  FIDUCIALUFIDUCIAL  [FIDUCIAL-MICRO]  116.96,62.48 0 bottom
FD157  FIDUCIALUFIDUCIAL  [FIDUCIAL-MICRO]  136.8,74.32 0 top
FD158  FIDUCIALUFIDUCIAL  [FIDUCIAL-MICRO]  136.8,74.32 0 bottom
FD159  FIDUCIALUFIDUCIAL  [FIDUCIAL-MICRO]  122.29,62.48 0 top
FD160  FIDUCIALUFIDUCIAL  [FIDUCIAL-MICRO]  133.34,62.48 0 bottom
FD161  FIDUCIALUFIDUCIAL  [FIDUCIAL-MICRO]  22.12,88.04 0 top
FD162  FIDUCIALUFIDUCIAL  [FIDUCIAL-MICRO]  22.12,88.04 0 bottom
FD163  FIDUCIALUFIDUCIAL  [FIDUCIAL-MICRO]  7.61,76.19 0 top
FD164  FIDUCIALUFIDUCIAL  [FIDUCIAL-MICRO]  18.66,76.19 0 bottom
FD165  FIDUCIALUFIDUCIAL  [FIDUCIAL-MICRO]  38.51,88.04 0 top
FD166  FIDUCIALUFIDUCIAL  [FIDUCIAL-MICRO]  38.51,88.04 0 bottom
FD167  FIDUCIALUFIDUCIAL  [FIDUCIAL-MICRO]  23.99,76.19 0 top
FD168  FIDUCIALUFIDUCIAL  [FIDUCIAL-MICRO]  35.04,76.19 0 bottom
FD169  FIDUCIALUFIDUCIAL  [FIDUCIAL-MICRO]  54.89,88.04 0 top
FD170  FIDUCIALUFIDUCIAL  [FIDUCIAL-MICRO]  54.89,88.04 0 bottom
FD171  FIDUCIALUFIDUCIAL  [FIDUCIAL-MICRO]  40.38,76.19 0 top
FD172  FIDUCIALUFIDUCIAL  [FIDUCIAL-MICRO]  51.42,76.19 0 bottom
FD173  FIDUCIALUFIDUCIAL  [FIDUCIAL-MICRO]  71.27,88.04 0 top
FD174  FIDUCIALUFIDUCIAL  [FIDUCIAL-MICRO]  71.27,88.04 0 bottom
FD175  FIDUCIALUFIDUCIAL  [FIDUCIAL-MICRO]  56.76,76.19 0 top
FD176  FIDUCIALUFIDUCIAL  [FIDUCIAL-MICRO]  67.81,76.19 0 bottom
FD177  FIDUCIALUFIDUCIAL  [FIDUCIAL-MICRO]  87.66,88.04 0 top
FD178  FIDUCIALUFIDUCIAL  [FIDUCIAL-MICRO]  87.66,88.04 0 bottom
FD179  FIDUCIALUFIDUCIAL  [FIDUCIAL-MICRO]  73.14,76.19 0 top
FD180  FIDUCIALUFIDUCIAL  [FIDUCIAL-MICRO]  84.19,76.19 0 bottom
FD181  FIDUCIALUFIDUCIAL  [FIDUCIAL-MICRO]  104.04,88.04 0 top
FD182  FIDUCIALUFIDUCIAL  [FIDUCIAL-MICRO]  104.04,88.04 0 bottom
FD183  FIDUCIALUFIDUCIAL  [FIDUCIAL-MICRO]  89.52,76.19 0 top
FD184  FIDUCIALUFIDUCIAL  [FIDUCIAL-MICRO]  100.57,76.19 0 bottom
FD185  FIDUCIALUFIDUCIAL  [FIDUCIAL-MICRO]  120.42,88.04 0 top
FD186  FIDUCIALUFIDUCIAL  [FIDUCIAL-MICRO]  120.42,88.04 0 bottom
FD187  FIDUCIALUFIDUCIAL  [FIDUCIAL-MICRO]  105.91,76.19 0 top
FD188  FIDUCIALUFIDUCIAL  [FIDUCIAL-MICRO]  116.96,76.19 0 bottom
FD189  FIDUCIALUFIDUCIAL  [FIDUCIAL-MICRO]  136.8,88.04 0 top
FD190  FIDUCIALUFIDUCIAL  [FIDUCIAL-MICRO]  136.8,88.04 0 bottom
FD191  FIDUCIALUFIDUCIAL  [FIDUCIAL-MICRO]  122.29,76.19 0 top
FD192  FIDUCIALUFIDUCIAL  [FIDUCIAL-MICRO]  133.34,76.19 0 bottom
J1  [1X04_NO_SILK]  21.34,18.29 270 top
J2  [1X04_NO_SILK]  37.72,18.29 270 top
J3  [1X04_NO_SILK]  54.1,18.29 270 top
J4  [1X04_NO_SILK]  70.48,18.29 270 top
J5  [1X04_NO_SILK]  86.87,18.29 270 top
J6  [1X04_NO_SILK]  103.25,18.29 270 top
J7  [1X04_NO_SILK]  119.63,18.29 270 top
J8  [1X04_NO_SILK]  136.02,18.29 270 top
J9  [1X04_NO_SILK]  21.34,32 270 top
J10  [1X04_NO_SILK]  37.72,32 270 top
J11  [1X04_NO_SILK]  54.1,32 270 top
J12  [1X04_NO_SILK]  70.48,32 270 top
J13  [1X04_NO_SILK]  86.87,32 270 top
J14  [1X04_NO_SILK]  103.25,32 270 top
J15  [1X04_NO_SILK]  119.63,32 270 top
J16  [1X04_NO_SILK]  136.02,32 270 top
J17  [1X04_NO_SILK]  21.34,45.72 270 top
J18  [1X04_NO_SILK]  37.72,45.72 270 top
J19  [1X04_NO_SILK]  54.1,45.72 270 top
J20  [1X04_NO_SILK]  70.48,45.72 270 top
J21  [1X04_NO_SILK]  86.87,45.72 270 top
J22  [1X04_NO_SILK]  103.25,45.72 270 top
J23  [1X04_NO_SILK]  119.63,45.72 270 top
J24  [1X04_NO_SILK]  136.02,45.72 270 top
J25  [1X04_NO_SILK]  21.34,59.44 270 top
J26  [1X04_NO_SILK]  37.72,59.44 270 top
J27  [1X04_NO_SILK]  54.1,59.44 270 top
J28  [1X04_NO_SILK]  70.48,59.44 270 top
J29  [1X04_NO_SILK]  86.87,59.44 270 top
J30  [1X04_NO_SILK]  103.25,59.44 270 top
J31  [1X04_NO_SILK]  119.63,59.44 270 top
J32  [1X04_NO_SILK]  136.02,59.44 270 top
J33  [1X04_NO_SILK]  21.34,73.15 270 top
J34  [1X04_NO_SILK]  37.72,73.15 270 top
J35  [1X04_NO_SILK]  54.1,73.15 270 top
J36  [1X04_NO_SILK]  70.48,73.15 270 top
J37  [1X04_NO_SILK]  86.87,73.15 270 top
J38  [1X04_NO_SILK]  103.25,73.15 270 top
J39  [1X04_NO_SILK]  119.63,73.15 270 top
J40  [1X04_NO_SILK]  136.02,73.15 270 top
J41  [1X04_NO_SILK]  21.34,86.87 270 top
J42  [1X04_NO_SILK]  37.72,86.87 270 top
J43  [1X04_NO_SILK]  54.1,86.87 270 top
J44  [1X04_NO_SILK]  70.48,86.87 270 top
J45  [1X04_NO_SILK]  86.87,86.87 270 top
J46  [1X04_NO_SILK]  103.25,86.87 270 top
J47  [1X04_NO_SILK]  119.63,86.87 270 top
J48  [1X04_NO_SILK]  136.02,86.87 270 top
L1  6.8UH  [07A7_6U8H]  13.59,10.67 0 top
L2  6.8UH  [07A7_6U8H]  29.97,10.67 0 top
L3  6.8UH  [07A7_6U8H]  46.35,10.67 0 top
L4  6.8UH  [07A7_6U8H]  62.74,10.67 0 top
L5  6.8UH  [07A7_6U8H]  79.12,10.67 0 top
L6  6.8UH  [07A7_6U8H]  95.5,10.67 0 top
L7  6.8UH  [07A7_6U8H]  111.89,10.67 0 top
L8  6.8UH  [07A7_6U8H]  128.27,10.67 0 top
L9  6.8UH  [07A7_6U8H]  13.59,24.38 0 top
L10  6.8UH  [07A7_6U8H]  29.97,24.38 0 top
L11  6.8UH  [07A7_6U8H]  46.35,24.38 0 top
L12  6.8UH  [07A7_6U8H]  62.74,24.38 0 top
L13  6.8UH  [07A7_6U8H]  79.12,24.38 0 top
L14  6.8UH  [07A7_6U8H]  95.5,24.38 0 top
L15  6.8UH  [07A7_6U8H]  111.89,24.38 0 top
L16  6.8UH  [07A7_6U8H]  128.27,24.38 0 top
L17  6.8UH  [07A7_6U8H]  13.59,38.1 0 top
L18  6.8UH  [07A7_6U8H]  29.97,38.1 0 top
L19  6.8UH  [07A7_6U8H]  46.35,38.1 0 top
L20  6.8UH  [07A7_6U8H]  62.74,38.1 0 top
L21  6.8UH  [07A7_6U8H]  79.12,38.1 0 top
L22  6.8UH  [07A7_6U8H]  95.5,38.1 0 top
L23  6.8UH  [07A7_6U8H]  111.89,38.1 0 top
L24  6.8UH  [07A7_6U8H]  128.27,38.1 0 top
L25  6.8UH  [07A7_6U8H]  13.59,51.82 0 top
L26  6.8UH  [07A7_6U8H]  29.97,51.82 0 top
L27  6.8UH  [07A7_6U8H]  46.35,51.82 0 top
L28  6.8UH  [07A7_6U8H]  62.74,51.82 0 top
L29  6.8UH  [07A7_6U8H]  79.12,51.82 0 top
L30  6.8UH  [07A7_6U8H]  95.5,51.82 0 top
L31  6.8UH  [07A7_6U8H]  111.89,51.82 0 top
L32  6.8UH  [07A7_6U8H]  128.27,51.82 0 top
L33  6.8UH  [07A7_6U8H]  13.59,65.53 0 top
L34  6.8UH  [07A7_6U8H]  29.97,65.53 0 top
L35  6.8UH  [07A7_6U8H]  46.35,65.53 0 top
L36  6.8UH  [07A7_6U8H]  62.74,65.53 0 top
L37  6.8UH  [07A7_6U8H]  79.12,65.53 0 top
L38  6.8UH  [07A7_6U8H]  95.5,65.53 0 top
L39  6.8UH  [07A7_6U8H]  111.89,65.53 0 top
L40  6.8UH  [07A7_6U8H]  128.27,65.53 0 top
L41  6.8UH  [07A7_6U8H]  13.59,79.25 0 top
L42  6.8UH  [07A7_6U8H]  29.97,79.25 0 top
L43  6.8UH  [07A7_6U8H]  46.35,79.25 0 top
L44  6.8UH  [07A7_6U8H]  62.74,79.25 0 top
L45  6.8UH  [07A7_6U8H]  79.12,79.25 0 top
L46  6.8UH  [07A7_6U8H]  95.5,79.25 0 top
L47  6.8UH  [07A7_6U8H]  111.89,79.25 0 top
L48  6.8UH  [07A7_6U8H]  128.27,79.25 0 top
LOGO1  SFE_LOGO_NAME_FLAMEBLANK  [BLANK]  21.72,7.11 0 top
LOGO2  OSHW-LOGOMINI  [OSHW-LOGO-MINI]  8.38,9.02 180 top
LOGO3  OSHW-LOGOMINI  [OSHW-LOGO-MINI]  24.77,9.02 180 top
LOGO4  SFE_LOGO_NAME_FLAMEBLANK  [BLANK]  38.1,7.11 0 top
LOGO5  OSHW-LOGOMINI  [OSHW-LOGO-MINI]  41.15,9.02 180 top
LOGO6  SFE_LOGO_NAME_FLAMEBLANK  [BLANK]  54.48,7.11 0 top
LOGO7  OSHW-LOGOMINI  [OSHW-LOGO-MINI]  57.53,9.02 180 top
LOGO8  SFE_LOGO_NAME_FLAMEBLANK  [BLANK]  70.87,7.11 0 top
LOGO9  OSHW-LOGOMINI  [OSHW-LOGO-MINI]  73.91,9.02 180 top
LOGO10  SFE_LOGO_NAME_FLAMEBLANK  [BLANK]  87.25,7.11 0 top
LOGO11  OSHW-LOGOMINI  [OSHW-LOGO-MINI]  90.3,9.02 180 top
LOGO12  SFE_LOGO_NAME_FLAMEBLANK  [BLANK]  103.63,7.11 0 top
LOGO13  OSHW-LOGOMINI  [OSHW-LOGO-MINI]  106.68,9.02 180 top
LOGO14  SFE_LOGO_NAME_FLAMEBLANK  [BLANK]  120.02,7.11 0 top
LOGO15  OSHW-LOGOMINI  [OSHW-LOGO-MINI]  123.06,9.02 180 top
LOGO16  SFE_LOGO_NAME_FLAMEBLANK  [BLANK]  136.4,7.11 0 top
LOGO17  OSHW-LOGOMINI  [OSHW-LOGO-MINI]  8.38,22.73 180 top
LOGO18  SFE_LOGO_NAME_FLAMEBLANK  [BLANK]  21.72,20.83 0 top
LOGO19  OSHW-LOGOMINI  [OSHW-LOGO-MINI]  24.77,22.73 180 top
LOGO20  SFE_LOGO_NAME_FLAMEBLANK  [BLANK]  38.1,20.83 0 top
LOGO21  OSHW-LOGOMINI  [OSHW-LOGO-MINI]  41.15,22.73 180 top
LOGO22  SFE_LOGO_NAME_FLAMEBLANK  [BLANK]  54.48,20.83 0 top
LOGO23  OSHW-LOGOMINI  [OSHW-LOGO-MINI]  57.53,22.73 180 top
LOGO24  SFE_LOGO_NAME_FLAMEBLANK  [BLANK]  70.87,20.83 0 top
LOGO25  OSHW-LOGOMINI  [OSHW-LOGO-MINI]  73.91,22.73 180 top
LOGO26  SFE_LOGO_NAME_FLAMEBLANK  [BLANK]  87.25,20.83 0 top
LOGO27  OSHW-LOGOMINI  [OSHW-LOGO-MINI]  90.3,22.73 180 top
LOGO28  SFE_LOGO_NAME_FLAMEBLANK  [BLANK]  103.63,20.83 0 top
LOGO29  OSHW-LOGOMINI  [OSHW-LOGO-MINI]  106.68,22.73 180 top
LOGO30  SFE_LOGO_NAME_FLAMEBLANK  [BLANK]  120.02,20.83 0 top
LOGO31  OSHW-LOGOMINI  [OSHW-LOGO-MINI]  123.06,22.73 180 top
LOGO32  SFE_LOGO_NAME_FLAMEBLANK  [BLANK]  136.4,20.83 0 top
LOGO33  OSHW-LOGOMINI  [OSHW-LOGO-MINI]  8.38,36.45 180 top
LOGO34  SFE_LOGO_NAME_FLAMEBLANK  [BLANK]  21.72,34.54 0 top
LOGO35  OSHW-LOGOMINI  [OSHW-LOGO-MINI]  24.77,36.45 180 top
LOGO36  SFE_LOGO_NAME_FLAMEBLANK  [BLANK]  38.1,34.54 0 top
LOGO37  OSHW-LOGOMINI  [OSHW-LOGO-MINI]  41.15,36.45 180 top
LOGO38  SFE_LOGO_NAME_FLAMEBLANK  [BLANK]  54.48,34.54 0 top
LOGO39  OSHW-LOGOMINI  [OSHW-LOGO-MINI]  57.53,36.45 180 top
LOGO40  SFE_LOGO_NAME_FLAMEBLANK  [BLANK]  70.87,34.54 0 top
LOGO41  OSHW-LOGOMINI  [OSHW-LOGO-MINI]  73.91,36.45 180 top
LOGO42  SFE_LOGO_NAME_FLAMEBLANK  [BLANK]  87.25,34.54 0 top
LOGO43  OSHW-LOGOMINI  [OSHW-LOGO-MINI]  90.3,36.45 180 top
LOGO44  SFE_LOGO_NAME_FLAMEBLANK  [BLANK]  103.63,34.54 0 top
LOGO45  OSHW-LOGOMINI  [OSHW-LOGO-MINI]  106.68,36.45 180 top
LOGO46  SFE_LOGO_NAME_FLAMEBLANK  [BLANK]  120.02,34.54 0 top
LOGO47  OSHW-LOGOMINI  [OSHW-LOGO-MINI]  123.06,36.45 180 top
LOGO48  SFE_LOGO_NAME_FLAMEBLANK  [BLANK]  136.4,34.54 0 top
LOGO49  OSHW-LOGOMINI  [OSHW-LOGO-MINI]  8.38,50.16 180 top
LOGO50  SFE_LOGO_NAME_FLAMEBLANK  [BLANK]  21.72,48.26 0 top
LOGO51  OSHW-LOGOMINI  [OSHW-LOGO-MINI]  24.77,50.16 180 top
LOGO52  SFE_LOGO_NAME_FLAMEBLANK  [BLANK]  38.1,48.26 0 top
LOGO53  OSHW-LOGOMINI  [OSHW-LOGO-MINI]  41.15,50.16 180 top
LOGO54  SFE_LOGO_NAME_FLAMEBLANK  [BLANK]  54.48,48.26 0 top
LOGO55  OSHW-LOGOMINI  [OSHW-LOGO-MINI]  57.53,50.16 180 top
LOGO56  SFE_LOGO_NAME_FLAMEBLANK  [BLANK]  70.87,48.26 0 top
LOGO57  OSHW-LOGOMINI  [OSHW-LOGO-MINI]  73.91,50.16 180 top
LOGO58  SFE_LOGO_NAME_FLAMEBLANK  [BLANK]  87.25,48.26 0 top
LOGO59  OSHW-LOGOMINI  [OSHW-LOGO-MINI]  90.3,50.16 180 top
LOGO60  SFE_LOGO_NAME_FLAMEBLANK  [BLANK]  103.63,48.26 0 top
LOGO61  OSHW-LOGOMINI  [OSHW-LOGO-MINI]  106.68,50.16 180 top
LOGO62  SFE_LOGO_NAME_FLAMEBLANK  [BLANK]  120.02,48.26 0 top
LOGO63  OSHW-LOGOMINI  [OSHW-LOGO-MINI]  123.06,50.16 180 top
LOGO64  SFE_LOGO_NAME_FLAMEBLANK  [BLANK]  136.4,48.26 0 top
LOGO65  OSHW-LOGOMINI  [OSHW-LOGO-MINI]  8.38,63.88 180 top
LOGO66  SFE_LOGO_NAME_FLAMEBLANK  [BLANK]  21.72,61.98 0 top
LOGO67  OSHW-LOGOMINI  [OSHW-LOGO-MINI]  24.77,63.88 180 top
LOGO68  SFE_LOGO_NAME_FLAMEBLANK  [BLANK]  38.1,61.98 0 top
LOGO69  OSHW-LOGOMINI  [OSHW-LOGO-MINI]  41.15,63.88 180 top
LOGO70  SFE_LOGO_NAME_FLAMEBLANK  [BLANK]  54.48,61.98 0 top
LOGO71  OSHW-LOGOMINI  [OSHW-LOGO-MINI]  57.53,63.88 180 top
LOGO72  SFE_LOGO_NAME_FLAMEBLANK  [BLANK]  70.87,61.98 0 top
LOGO73  OSHW-LOGOMINI  [OSHW-LOGO-MINI]  73.91,63.88 180 top
LOGO74  SFE_LOGO_NAME_FLAMEBLANK  [BLANK]  87.25,61.98 0 top
LOGO75  OSHW-LOGOMINI  [OSHW-LOGO-MINI]  90.3,63.88 180 top
LOGO76  SFE_LOGO_NAME_FLAMEBLANK  [BLANK]  103.63,61.98 0 top
LOGO77  OSHW-LOGOMINI  [OSHW-LOGO-MINI]  106.68,63.88 180 top
LOGO78  SFE_LOGO_NAME_FLAMEBLANK  [BLANK]  120.02,61.98 0 top
LOGO79  OSHW-LOGOMINI  [OSHW-LOGO-MINI]  123.06,63.88 180 top
LOGO80  SFE_LOGO_NAME_FLAMEBLANK  [BLANK]  136.4,61.98 0 top
LOGO81  OSHW-LOGOMINI  [OSHW-LOGO-MINI]  8.38,77.6 180 top
LOGO82  SFE_LOGO_NAME_FLAMEBLANK  [BLANK]  21.72,75.69 0 top
LOGO83  OSHW-LOGOMINI  [OSHW-LOGO-MINI]  24.77,77.6 180 top
LOGO84  SFE_LOGO_NAME_FLAMEBLANK  [BLANK]  38.1,75.69 0 top
LOGO85  OSHW-LOGOMINI  [OSHW-LOGO-MINI]  41.15,77.6 180 top
LOGO86  SFE_LOGO_NAME_FLAMEBLANK  [BLANK]  54.48,75.69 0 top
LOGO87  OSHW-LOGOMINI  [OSHW-LOGO-MINI]  57.53,77.6 180 top
LOGO88  SFE_LOGO_NAME_FLAMEBLANK  [BLANK]  70.87,75.69 0 top
LOGO89  OSHW-LOGOMINI  [OSHW-LOGO-MINI]  73.91,77.6 180 top
LOGO90  SFE_LOGO_NAME_FLAMEBLANK  [BLANK]  87.25,75.69 0 top
LOGO91  OSHW-LOGOMINI  [OSHW-LOGO-MINI]  90.3,77.6 180 top
LOGO92  SFE_LOGO_NAME_FLAMEBLANK  [BLANK]  103.63,75.69 0 top
LOGO93  OSHW-LOGOMINI  [OSHW-LOGO-MINI]  106.68,77.6 180 top
LOGO94  SFE_LOGO_NAME_FLAMEBLANK  [BLANK]  120.02,75.69 0 top
LOGO95  OSHW-LOGOMINI  [OSHW-LOGO-MINI]  123.06,77.6 180 top
LOGO96  SFE_LOGO_NAME_FLAMEBLANK  [BLANK]  136.4,75.69 0 top
R1  220K  [0402-TIGHT]  7.75,14.48 270 top
R2  41.2K  [0402-TIGHT]  8.76,16.51 270 top
R3  93.1k  [0402-TIGHT]  12.32,18.41 0 top
R4  22k  [0402-TIGHT]  10.29,18.41 0 top
R5  220K  [0402-TIGHT]  24.13,14.48 270 top
R6  41.2K  [0402-TIGHT]  25.15,16.51 270 top
R7  93.1k  [0402-TIGHT]  28.7,18.41 0 top
R8  22k  [0402-TIGHT]  26.67,18.41 0 top
R9  220K  [0402-TIGHT]  40.51,14.48 270 top
R10  41.2K  [0402-TIGHT]  41.53,16.51 270 top
R11  93.1k  [0402-TIGHT]  45.08,18.41 0 top
R12  22k  [0402-TIGHT]  43.05,18.41 0 top
R13  220K  [0402-TIGHT]  56.9,14.48 270 top
R14  41.2K  [0402-TIGHT]  57.91,16.51 270 top
R15  93.1k  [0402-TIGHT]  61.47,18.41 0 top
R16  22k  [0402-TIGHT]  59.44,18.41 0 top
R17  220K  [0402-TIGHT]  73.28,14.48 270 top
R18  41.2K  [0402-TIGHT]  74.3,16.51 270 top
R19  93.1k  [0402-TIGHT]  77.85,18.41 0 top
R20  22k  [0402-TIGHT]  75.82,18.41 0 top
R21  220K  [0402-TIGHT]  89.66,14.48 270 top
R22  41.2K  [0402-TIGHT]  90.68,16.51 270 top
R23  93.1k  [0402-TIGHT]  94.23,18.41 0 top
R24  22k  [0402-TIGHT]  92.2,18.41 0 top
R25  220K  [0402-TIGHT]  106.05,14.48 270 top
R26  41.2K  [0402-TIGHT]  107.06,16.51 270 top
R27  93.1k  [0402-TIGHT]  110.62,18.41 0 top
R28  22k  [0402-TIGHT]  108.59,18.41 0 top
R29  220K  [0402-TIGHT]  122.43,14.48 270 top
R30  41.2K  [0402-TIGHT]  123.44,16.51 270 top
R31  93.1k  [0402-TIGHT]  127,18.41 0 top
R32  22k  [0402-TIGHT]  124.97,18.41 0 top
R33  220K  [0402-TIGHT]  7.75,28.19 270 top
R34  41.2K  [0402-TIGHT]  8.76,30.23 270 top
R35  93.1k  [0402-TIGHT]  12.32,32.13 0 top
R36  22k  [0402-TIGHT]  10.29,32.13 0 top
R37  220K  [0402-TIGHT]  24.13,28.19 270 top
R38  41.2K  [0402-TIGHT]  25.15,30.23 270 top
R39  93.1k  [0402-TIGHT]  28.7,32.13 0 top
R40  22k  [0402-TIGHT]  26.67,32.13 0 top
R41  220K  [0402-TIGHT]  40.51,28.19 270 top
R42  41.2K  [0402-TIGHT]  41.53,30.23 270 top
R43  93.1k  [0402-TIGHT]  45.08,32.13 0 top
R44  22k  [0402-TIGHT]  43.05,32.13 0 top
R45  220K  [0402-TIGHT]  56.9,28.19 270 top
R46  41.2K  [0402-TIGHT]  57.91,30.23 270 top
R47  93.1k  [0402-TIGHT]  61.47,32.13 0 top
R48  22k  [0402-TIGHT]  59.44,32.13 0 top
R49  220K  [0402-TIGHT]  73.28,28.19 270 top
R50  41.2K  [0402-TIGHT]  74.3,30.23 270 top
R51  93.1k  [0402-TIGHT]  77.85,32.13 0 top
R52  22k  [0402-TIGHT]  75.82,32.13 0 top
R53  220K  [0402-TIGHT]  89.66,28.19 270 top
R54  41.2K  [0402-TIGHT]  90.68,30.23 270 top
R55  93.1k  [0402-TIGHT]  94.23,32.13 0 top
R56  22k  [0402-TIGHT]  92.2,32.13 0 top
R57  220K  [0402-TIGHT]  106.05,28.19 270 top
R58  41.2K  [0402-TIGHT]  107.06,30.23 270 top
R59  93.1k  [0402-TIGHT]  110.62,32.13 0 top
R60  22k  [0402-TIGHT]  108.59,32.13 0 top
R61  220K  [0402-TIGHT]  122.43,28.19 270 top
R62  41.2K  [0402-TIGHT]  123.44,30.23 270 top
R63  93.1k  [0402-TIGHT]  127,32.13 0 top
R64  22k  [0402-TIGHT]  124.97,32.13 0 top
R65  220K  [0402-TIGHT]  7.75,41.91 270 top
R66  41.2K  [0402-TIGHT]  8.76,43.94 270 top
R67  93.1k  [0402-TIGHT]  12.32,45.85 0 top
R68  22k  [0402-TIGHT]  10.29,45.85 0 top
R69  220K  [0402-TIGHT]  24.13,41.91 270 top
R70  41.2K  [0402-TIGHT]  25.15,43.94 270 top
R71  93.1k  [0402-TIGHT]  28.7,45.85 0 top
R72  22k  [0402-TIGHT]  26.67,45.85 0 top
R73  220K  [0402-TIGHT]  40.51,41.91 270 top
R74  41.2K  [0402-TIGHT]  41.53,43.94 270 top
R75  93.1k  [0402-TIGHT]  45.08,45.85 0 top
R76  22k  [0402-TIGHT]  43.05,45.85 0 top
R77  220K  [0402-TIGHT]  56.9,41.91 270 top
R78  41.2K  [0402-TIGHT]  57.91,43.94 270 top
R79  93.1k  [0402-TIGHT]  61.47,45.85 0 top
R80  22k  [0402-TIGHT]  59.44,45.85 0 top
R81  220K  [0402-TIGHT]  73.28,41.91 270 top
R82  41.2K  [0402-TIGHT]  74.3,43.94 270 top
R83  93.1k  [0402-TIGHT]  77.85,45.85 0 top
R84  22k  [0402-TIGHT]  75.82,45.85 0 top
R85  220K  [0402-TIGHT]  89.66,41.91 270 top
R86  41.2K  [0402-TIGHT]  90.68,43.94 270 top
R87  93.1k  [0402-TIGHT]  94.23,45.85 0 top
R88  22k  [0402-TIGHT]  92.2,45.85 0 top
R89  220K  [0402-TIGHT]  106.05,41.91 270 top
R90  41.2K  [0402-TIGHT]  107.06,43.94 270 top
R91  93.1k  [0402-TIGHT]  110.62,45.85 0 top
R92  22k  [0402-TIGHT]  108.59,45.85 0 top
R93  220K  [0402-TIGHT]  122.43,41.91 270 top
R94  41.2K  [0402-TIGHT]  123.44,43.94 270 top
R95  93.1k  [0402-TIGHT]  127,45.85 0 top
R96  22k  [0402-TIGHT]  124.97,45.85 0 top
R97  220K  [0402-TIGHT]  7.75,55.63 270 top
R98  41.2K  [0402-TIGHT]  8.76,57.66 270 top
R99  93.1k  [0402-TIGHT]  12.32,59.56 0 top
R100  22k  [0402-TIGHT]  10.29,59.56 0 top
R101  220K  [0402-TIGHT]  24.13,55.63 270 top
R102  41.2K  [0402-TIGHT]  25.15,57.66 270 top
R103  93.1k  [0402-TIGHT]  28.7,59.56 0 top
R104  22k  [0402-TIGHT]  26.67,59.56 0 top
R105  220K  [0402-TIGHT]  40.51,55.63 270 top
R106  41.2K  [0402-TIGHT]  41.53,57.66 270 top
R107  93.1k  [0402-TIGHT]  45.08,59.56 0 top
R108  22k  [0402-TIGHT]  43.05,59.56 0 top
R109  220K  [0402-TIGHT]  56.9,55.63 270 top
R110  41.2K  [0402-TIGHT]  57.91,57.66 270 top
R111  93.1k  [0402-TIGHT]  61.47,59.56 0 top
R112  22k  [0402-TIGHT]  59.44,59.56 0 top
R113  220K  [0402-TIGHT]  73.28,55.63 270 top
R114  41.2K  [0402-TIGHT]  74.3,57.66 270 top
R115  93.1k  [0402-TIGHT]  77.85,59.56 0 top
R116  22k  [0402-TIGHT]  75.82,59.56 0 top
R117  220K  [0402-TIGHT]  89.66,55.63 270 top
R118  41.2K  [0402-TIGHT]  90.68,57.66 270 top
R119  93.1k  [0402-TIGHT]  94.23,59.56 0 top
R120  22k  [0402-TIGHT]  92.2,59.56 0 top
R121  220K  [0402-TIGHT]  106.05,55.63 270 top
R122  41.2K  [0402-TIGHT]  107.06,57.66 270 top
R123  93.1k  [0402-TIGHT]  110.62,59.56 0 top
R124  22k  [0402-TIGHT]  108.59,59.56 0 top
R125  220K  [0402-TIGHT]  122.43,55.63 270 top
R126  41.2K  [0402-TIGHT]  123.44,57.66 270 top
R127  93.1k  [0402-TIGHT]  127,59.56 0 top
R128  22k  [0402-TIGHT]  124.97,59.56 0 top
R129  220K  [0402-TIGHT]  7.75,69.34 270 top
R130  41.2K  [0402-TIGHT]  8.76,71.37 270 top
R131  93.1k  [0402-TIGHT]  12.32,73.28 0 top
R132  22k  [0402-TIGHT]  10.29,73.28 0 top
R133  220K  [0402-TIGHT]  24.13,69.34 270 top
R134  41.2K  [0402-TIGHT]  25.15,71.37 270 top
R135  93.1k  [0402-TIGHT]  28.7,73.28 0 top
R136  22k  [0402-TIGHT]  26.67,73.28 0 top
R137  220K  [0402-TIGHT]  40.51,69.34 270 top
R138  41.2K  [0402-TIGHT]  41.53,71.37 270 top
R139  93.1k  [0402-TIGHT]  45.08,73.28 0 top
R140  22k  [0402-TIGHT]  43.05,73.28 0 top
R141  220K  [0402-TIGHT]  56.9,69.34 270 top
R142  41.2K  [0402-TIGHT]  57.91,71.37 270 top
R143  93.1k  [0402-TIGHT]  61.47,73.28 0 top
R144  22k  [0402-TIGHT]  59.44,73.28 0 top
R145  220K  [0402-TIGHT]  73.28,69.34 270 top
R146  41.2K  [0402-TIGHT]  74.3,71.37 270 top
R147  93.1k  [0402-TIGHT]  77.85,73.28 0 top
R148  22k  [0402-TIGHT]  75.82,73.28 0 top
R149  220K  [0402-TIGHT]  89.66,69.34 270 top
R150  41.2K  [0402-TIGHT]  90.68,71.37 270 top
R151  93.1k  [0402-TIGHT]  94.23,73.28 0 top
R152  22k  [0402-TIGHT]  92.2,73.28 0 top
R153  220K  [0402-TIGHT]  106.05,69.34 270 top
R154  41.2K  [0402-TIGHT]  107.06,71.37 270 top
R155  93.1k  [0402-TIGHT]  110.62,73.28 0 top
R156  22k  [0402-TIGHT]  108.59,73.28 0 top
R157  220K  [0402-TIGHT]  122.43,69.34 270 top
R158  41.2K  [0402-TIGHT]  123.44,71.37 270 top
R159  93.1k  [0402-TIGHT]  127,73.28 0 top
R160  22k  [0402-TIGHT]  124.97,73.28 0 top
R161  220K  [0402-TIGHT]  7.75,83.06 270 top
R162  41.2K  [0402-TIGHT]  8.76,85.09 270 top
R163  93.1k  [0402-TIGHT]  12.32,87 0 top
R164  22k  [0402-TIGHT]  10.29,87 0 top
R165  220K  [0402-TIGHT]  24.13,83.06 270 top
R166  41.2K  [0402-TIGHT]  25.15,85.09 270 top
R167  93.1k  [0402-TIGHT]  28.7,87 0 top
R168  22k  [0402-TIGHT]  26.67,87 0 top
R169  220K  [0402-TIGHT]  40.51,83.06 270 top
R170  41.2K  [0402-TIGHT]  41.53,85.09 270 top
R171  93.1k  [0402-TIGHT]  45.08,87 0 top
R172  22k  [0402-TIGHT]  43.05,87 0 top
R173  220K  [0402-TIGHT]  56.9,83.06 270 top
R174  41.2K  [0402-TIGHT]  57.91,85.09 270 top
R175  93.1k  [0402-TIGHT]  61.47,87 0 top
R176  22k  [0402-TIGHT]  59.44,87 0 top
R177  220K  [0402-TIGHT]  73.28,83.06 270 top
R178  41.2K  [0402-TIGHT]  74.3,85.09 270 top
R179  93.1k  [0402-TIGHT]  77.85,87 0 top
R180  22k  [0402-TIGHT]  75.82,87 0 top
R181  220K  [0402-TIGHT]  89.66,83.06 270 top
R182  41.2K  [0402-TIGHT]  90.68,85.09 270 top
R183  93.1k  [0402-TIGHT]  94.23,87 0 top
R184  22k  [0402-TIGHT]  92.2,87 0 top
R185  220K  [0402-TIGHT]  106.05,83.06 270 top
R186  41.2K  [0402-TIGHT]  107.06,85.09 270 top
R187  93.1k  [0402-TIGHT]  110.62,87 0 top
R188  22k  [0402-TIGHT]  108.59,87 0 top
R189  220K  [0402-TIGHT]  122.43,83.06 270 top
R190  41.2K  [0402-TIGHT]  123.44,85.09 270 top
R191  93.1k  [0402-TIGHT]  127,87 0 top
R192  22k  [0402-TIGHT]  124.97,87 0 top
U1  AP63357  [V-DFN3020-13]  11.18,16 180 top
U2  AP63357  [V-DFN3020-13]  27.56,16 180 top
U3  AP63357  [V-DFN3020-13]  43.94,16 180 top
U4  AP63357  [V-DFN3020-13]  60.32,16 180 top
U5  AP63357  [V-DFN3020-13]  76.71,16 180 top
U6  AP63357  [V-DFN3020-13]  93.09,16 180 top
U7  AP63357  [V-DFN3020-13]  109.47,16 180 top
U8  AP63357  [V-DFN3020-13]  125.86,16 180 top
U9  AP63357  [V-DFN3020-13]  11.18,29.72 180 top
U10  AP63357  [V-DFN3020-13]  27.56,29.72 180 top
U11  AP63357  [V-DFN3020-13]  43.94,29.72 180 top
U12  AP63357  [V-DFN3020-13]  60.32,29.72 180 top
U13  AP63357  [V-DFN3020-13]  76.71,29.72 180 top
U14  AP63357  [V-DFN3020-13]  93.09,29.72 180 top
U15  AP63357  [V-DFN3020-13]  109.47,29.72 180 top
U16  AP63357  [V-DFN3020-13]  125.86,29.72 180 top
U17  AP63357  [V-DFN3020-13]  11.18,43.43 180 top
U18  AP63357  [V-DFN3020-13]  27.56,43.43 180 top
U19  AP63357  [V-DFN3020-13]  43.94,43.43 180 top
U20  AP63357  [V-DFN3020-13]  60.32,43.43 180 top
U21  AP63357  [V-DFN3020-13]  76.71,43.43 180 top
U22  AP63357  [V-DFN3020-13]  93.09,43.43 180 top
U23  AP63357  [V-DFN3020-13]  109.47,43.43 180 top
U24  AP63357  [V-DFN3020-13]  125.86,43.43 180 top
U25  AP63357  [V-DFN3020-13]  11.18,57.15 180 top
U26  AP63357  [V-DFN3020-13]  27.56,57.15 180 top
U27  AP63357  [V-DFN3020-13]  43.94,57.15 180 top
U28  AP63357  [V-DFN3020-13]  60.32,57.15 180 top
U29  AP63357  [V-DFN3020-13]  76.71,57.15 180 top
U30  AP63357  [V-DFN3020-13]  93.09,57.15 180 top
U31  AP63357  [V-DFN3020-13]  109.47,57.15 180 top
U32  AP63357  [V-DFN3020-13]  125.86,57.15 180 top
U33  AP63357  [V-DFN3020-13]  11.18,70.87 180 top
U34  AP63357  [V-DFN3020-13]  27.56,70.87 180 top
U35  AP63357  [V-DFN3020-13]  43.94,70.87 180 top
U36  AP63357  [V-DFN3020-13]  60.32,70.87 180 top
U37  AP63357  [V-DFN3020-13]  76.71,70.87 180 top
U38  AP63357  [V-DFN3020-13]  93.09,70.87 180 top
U39  AP63357  [V-DFN3020-13]  109.47,70.87 180 top
U40  AP63357  [V-DFN3020-13]  125.86,70.87 180 top
U41  AP63357  [V-DFN3020-13]  11.18,84.58 180 top
U42  AP63357  [V-DFN3020-13]  27.56,84.58 180 top
U43  AP63357  [V-DFN3020-13]  43.94,84.58 180 top
U44  AP63357  [V-DFN3020-13]  60.32,84.58 180 top
U45  AP63357  [V-DFN3020-13]  76.71,84.58 180 top
U46  AP63357  [V-DFN3020-13]  93.09,84.58 180 top
U47  AP63357  [V-DFN3020-13]  109.47,84.58 180 top
U48  AP63357  [V-DFN3020-13]  125.86,84.58 180 top
U$1  [SFE_LOGO_FLAME_COPPER_EXPOSED_.1]  8.13,18.54 180 top
U$2  [#EN_#10]  19.56,18.29 180 bottom
U$3  [#VIN_#11]  19.43,15.75 180 bottom
U$4  [#GND#13]  19.81,13.21 90 bottom
U$5  [#_5V_#6]  19.43,10.67 180 bottom
U$6  [BABY0]  14.48,17.91 180 top
U$7  [BUCK0]  13.84,19.43 180 top
U$8  [HIGH_TEMP_WARNING]  18.03,18.03 180 top
U$9  [5V0]  11.43,19.43 180 top
U$10  [HOT##7]  19.68,16.13 241 top
U$11  [SFE_LOGO_FLAME_COPPER_EXPOSED_.1]  24.51,18.54 180 top
U$12  [HIGH_TEMP_WARNING]  34.42,18.03 180 top
U$13  [BABY0]  30.86,17.91 180 top
U$14  [SPARKFUN0]  19.81,11.05 270 top
U$15  [BUCK0]  30.23,19.43 180 top
U$16  [5V0]  27.81,19.43 180 top
U$17  [SPARKFUN0]  36.2,11.05 270 top
U$18  [#EN_#10]  35.94,18.29 180 bottom
U$19  [#VIN_#11]  35.81,15.75 180 bottom
U$20  [#GND#13]  36.2,13.21 90 bottom
U$21  [#_5V_#6]  35.81,10.67 180 bottom
U$22  [HOT##7]  36.07,16.13 241 top
U$23  [SFE_LOGO_FLAME_COPPER_EXPOSED_.1]  40.89,18.54 180 top
U$24  [HIGH_TEMP_WARNING]  50.8,18.03 180 top
U$25  [BABY0]  47.24,17.91 180 top
U$26  [BUCK0]  46.61,19.43 180 top
U$27  [5V0]  44.2,19.43 180 top
U$28  [SPARKFUN0]  52.58,11.05 270 top
U$29  [#EN_#10]  52.32,18.29 180 bottom
U$30  [#VIN_#11]  52.2,15.75 180 bottom
U$31  [#GND#13]  52.58,13.21 90 bottom
U$32  [#_5V_#6]  52.2,10.67 180 bottom
U$33  [HOT##7]  52.45,16.13 241 top
U$34  [SFE_LOGO_FLAME_COPPER_EXPOSED_.1]  57.28,18.54 180 top
U$35  [HIGH_TEMP_WARNING]  67.18,18.03 180 top
U$36  [BABY0]  63.63,17.91 180 top
U$37  [BUCK0]  62.99,19.43 180 top
U$38  [5V0]  60.58,19.43 180 top
U$39  [SPARKFUN0]  68.96,11.05 270 top
U$40  [#EN_#10]  68.71,18.29 180 bottom
U$41  [#VIN_#11]  68.58,15.75 180 bottom
U$42  [#GND#13]  68.96,13.21 90 bottom
U$43  [#_5V_#6]  68.58,10.67 180 bottom
U$44  [HOT##7]  68.83,16.13 241 top
U$45  [SFE_LOGO_FLAME_COPPER_EXPOSED_.1]  73.66,18.54 180 top
U$46  [HIGH_TEMP_WARNING]  83.57,18.03 180 top
U$47  [BABY0]  80.01,17.91 180 top
U$48  [BUCK0]  79.38,19.43 180 top
U$49  [5V0]  76.96,19.43 180 top
U$50  [SPARKFUN0]  85.34,11.05 270 top
U$51  [#EN_#10]  85.09,18.29 180 bottom
U$52  [#VIN_#11]  84.96,15.75 180 bottom
U$53  [#GND#13]  85.34,13.21 90 bottom
U$54  [#_5V_#6]  84.96,10.67 180 bottom
U$55  [HOT##7]  85.22,16.13 241 top
U$56  [SFE_LOGO_FLAME_COPPER_EXPOSED_.1]  90.04,18.54 180 top
U$57  [HIGH_TEMP_WARNING]  99.95,18.03 180 top
U$58  [BABY0]  96.39,17.91 180 top
U$59  [BUCK0]  95.76,19.43 180 top
U$60  [5V0]  93.34,19.43 180 top
U$61  [SPARKFUN0]  101.73,11.05 270 top
U$62  [#EN_#10]  101.47,18.29 180 bottom
U$63  [#VIN_#11]  101.35,15.75 180 bottom
U$64  [#GND#13]  101.73,13.21 90 bottom
U$65  [#_5V_#6]  101.35,10.67 180 bottom
U$66  [HOT##7]  101.6,16.13 241 top
U$67  [SFE_LOGO_FLAME_COPPER_EXPOSED_.1]  106.43,18.54 180 top
U$68  [HIGH_TEMP_WARNING]  116.33,18.03 180 top
U$69  [BABY0]  112.78,17.91 180 top
U$70  [BUCK0]  112.14,19.43 180 top
U$71  [5V0]  109.73,19.43 180 top
U$72  [SPARKFUN0]  118.11,11.05 270 top
U$73  [#EN_#10]  117.86,18.29 180 bottom
U$74  [#VIN_#11]  117.73,15.75 180 bottom
U$75  [#GND#13]  118.11,13.21 90 bottom